# EAGLE board SparkFun_Main_Board_Single_v21-Panel (EAGLE 9.6.2), part 1 of 3
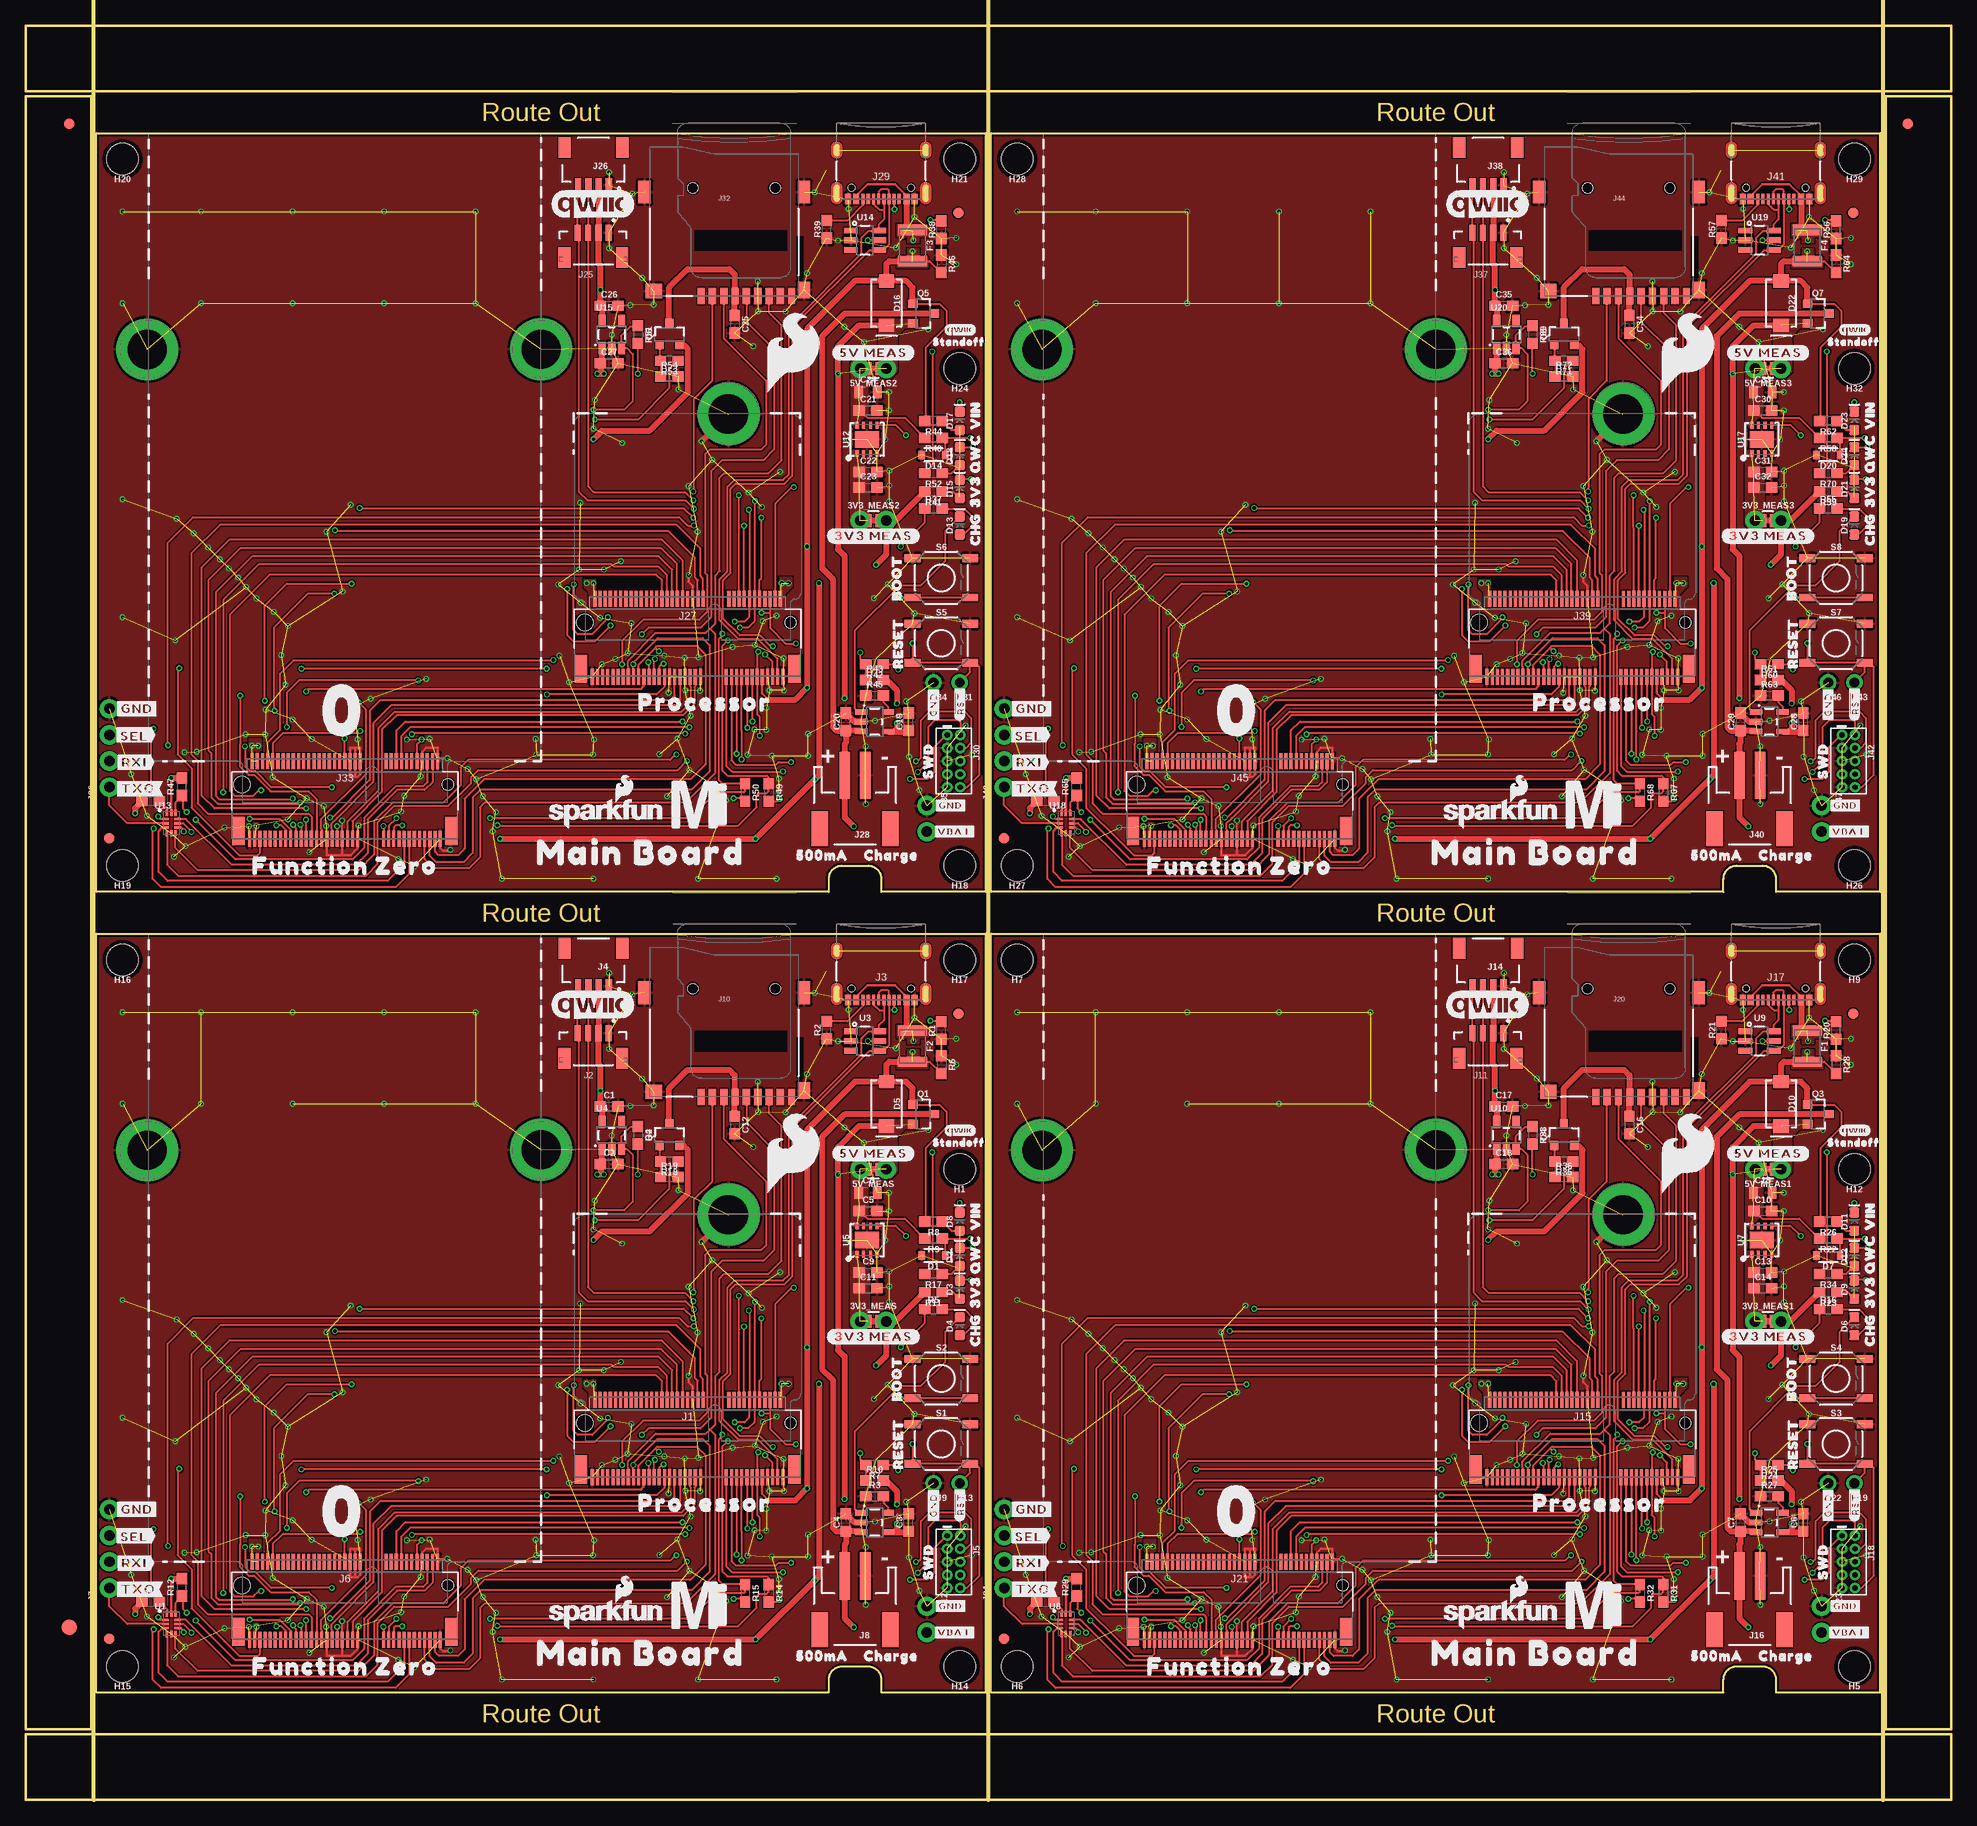
[diagram p0: board, top side]
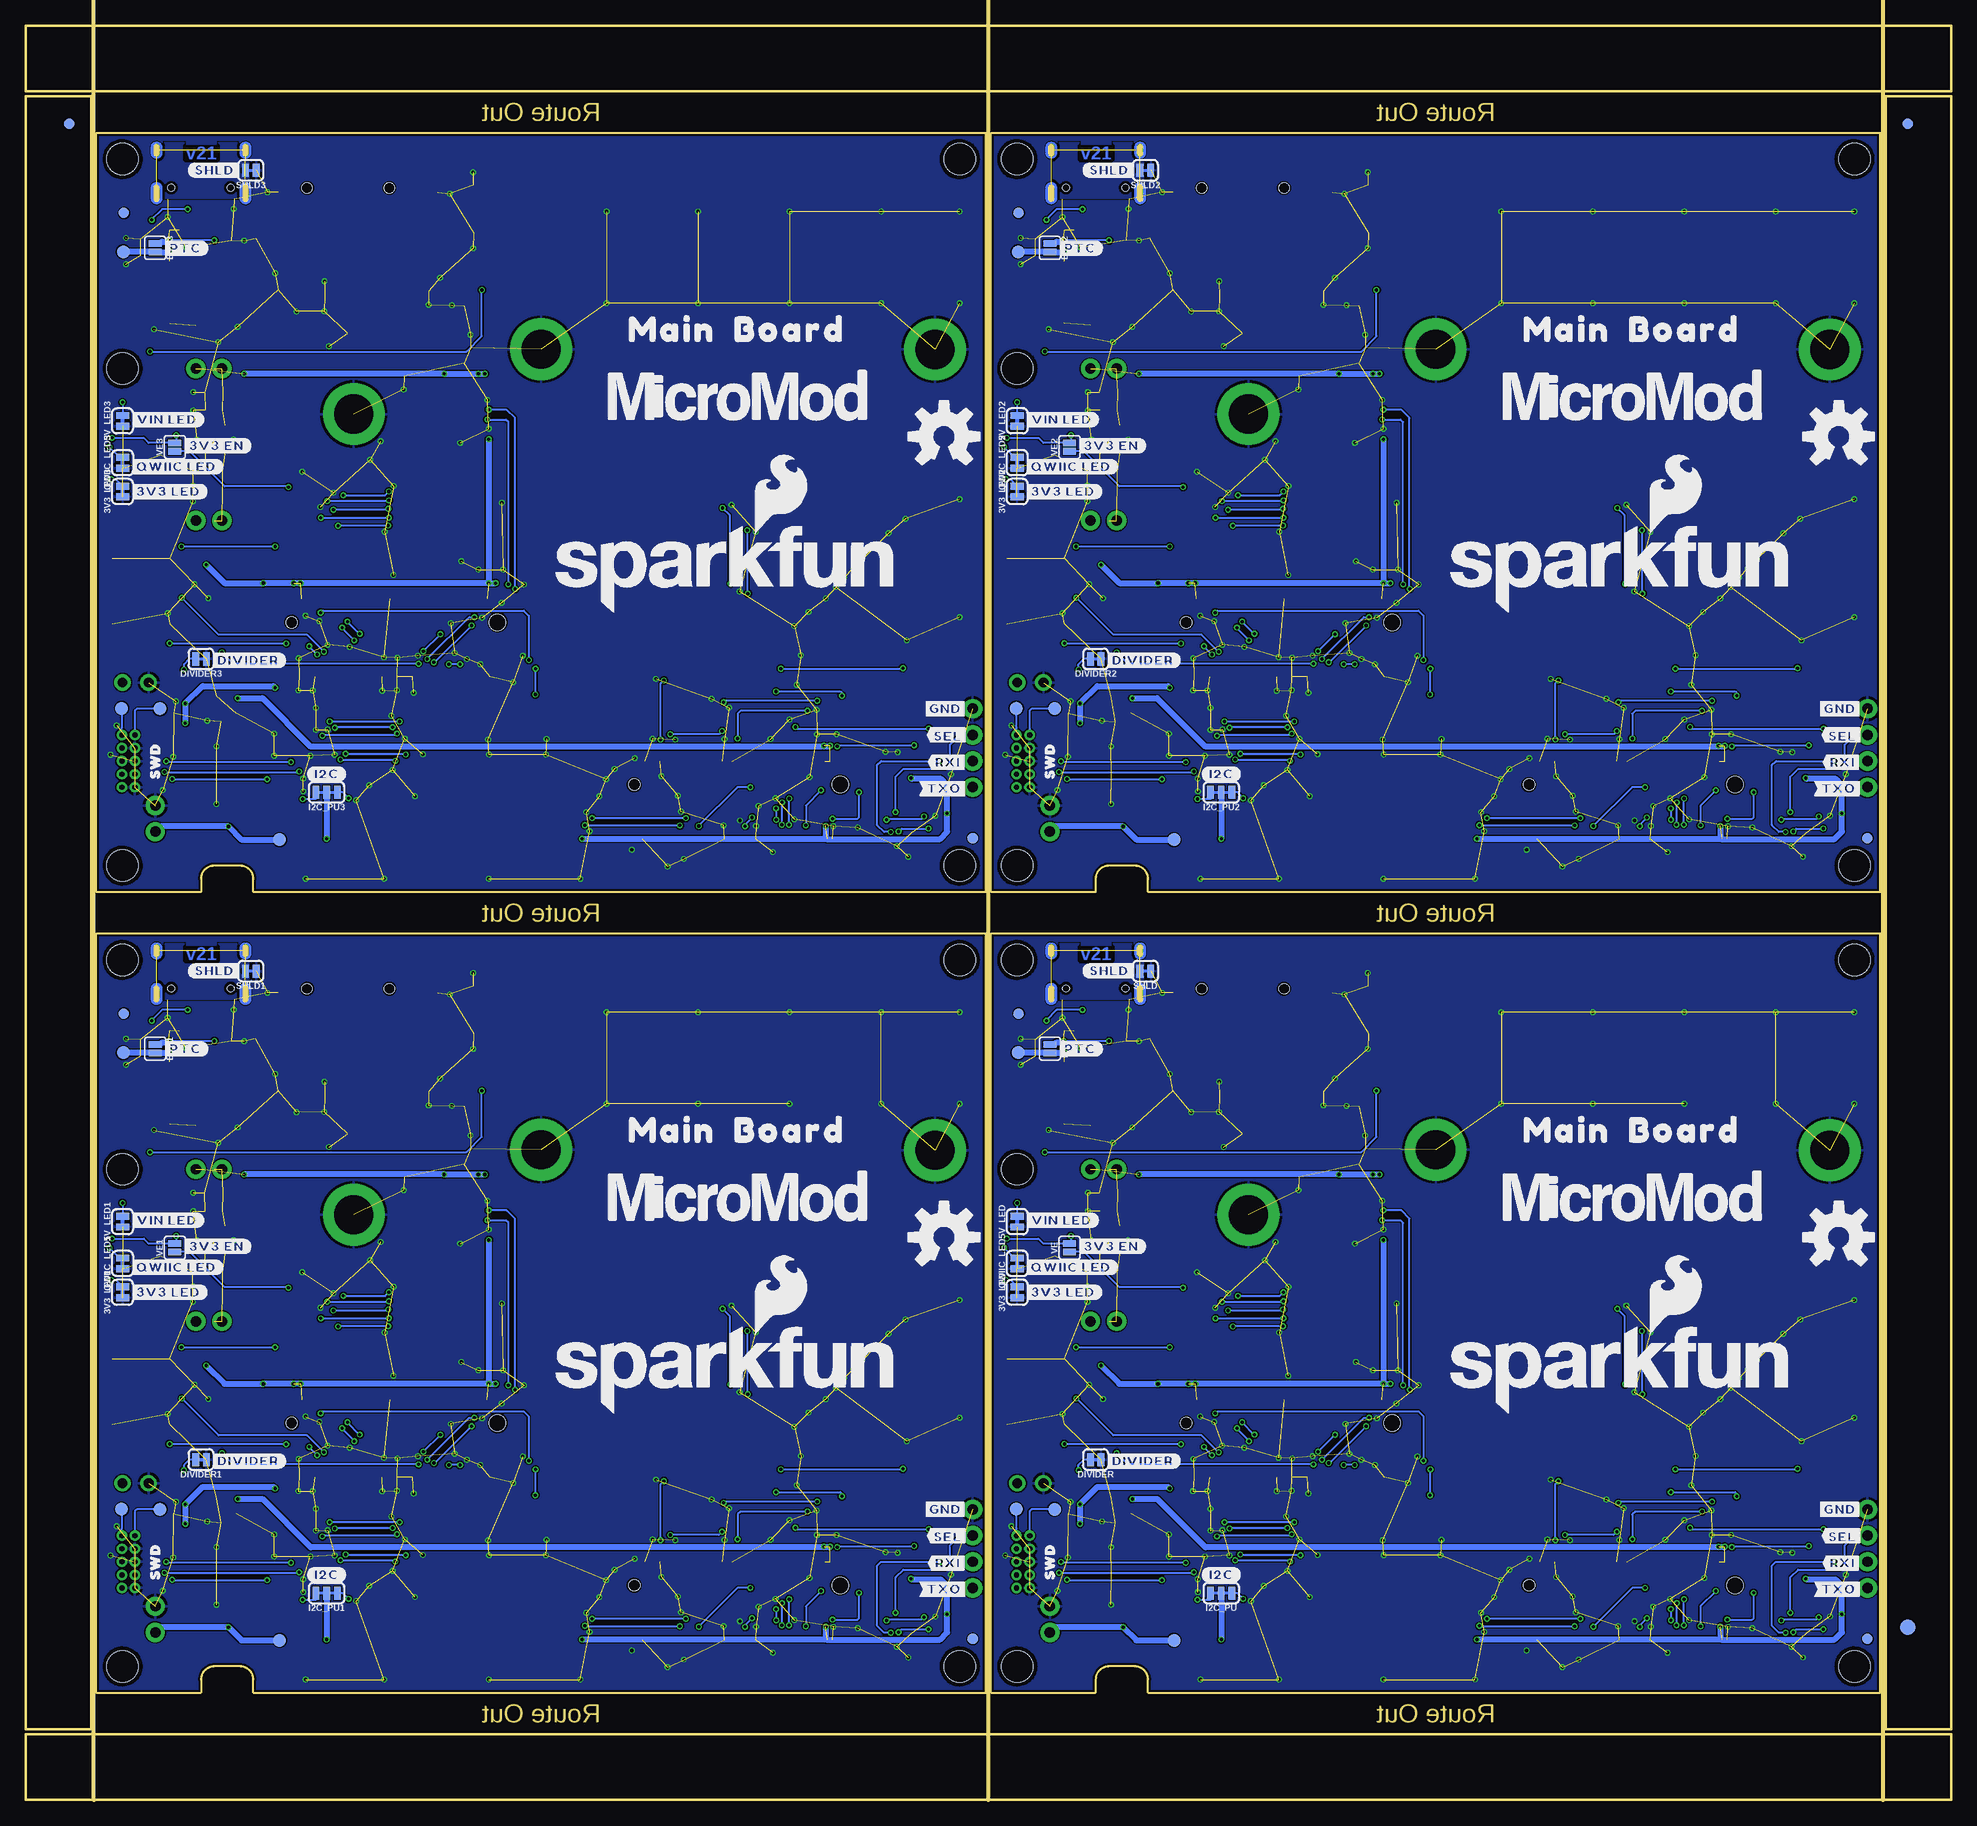
[diagram p1: board, bottom side, seen from below]

Size 186.94 x 172.21 mm. Coordinates in mm from the lower left corner, seen from the top.
Outline: 6.86,84.07 93.22,84.07 93.22,10.41 83.06,10.41 83.06,11.68 arc90 81.79,12.95 79.25,12.95 arc90 77.98,11.68 77.98,10.41 6.86,10.41 6.86,84.07
Outline: 93.73,84.07 180.09,84.07 180.09,10.41 169.93,10.41 169.93,11.68 arc90 168.66,12.95 166.12,12.95 arc90 164.85,11.68 164.85,10.41 93.73,10.41 93.73,84.07
Outline: 6.86,161.8 93.22,161.8 93.22,88.14 83.06,88.14 83.06,89.41 arc90 81.79,90.68 79.25,90.68 arc90 77.98,89.41 77.98,88.14 6.86,88.14 6.86,161.8
Outline: 93.73,161.8 180.09,161.8 180.09,88.14 169.93,88.14 169.93,89.41 arc90 168.66,90.68 166.12,90.68 arc90 164.85,89.41 164.85,88.14 93.73,88.14 93.73,161.8
Outline: 0,6.35 186.94,6.35 186.94,0 0,0 0,6.35
Outline: 180.59,165.35 186.94,165.35 186.94,6.86 180.59,6.86 180.59,165.35
Outline: 0,172.21 186.94,172.21 186.94,165.86 0,165.86 0,172.21
Outline: 0,165.35 6.35,165.35 6.35,6.86 0,6.86 0,165.35
Copper layers (1*16): Top 0.035mm / dielectric 1.5mm / Bottom 0.035mm
Design rules "SparkFun_Main_Board_Single_v21": minimum track width 5mil, minimum drill 0.3mm, track to track 5mil, track to pad 5mil, pad to pad 5mil, via to via 5mil, smd to smd 5mil, copper to edge 7mil, drill to drill 7mil, minimum pad ring 5mil, minimum via ring 5mil, stop-mask expansion 2.5mil, vias tented up to drill 25mil, thermal gap 10mil
Net classes: 0 default: width 0.178 mm, drill 0.305 mm; 1 POWER: width 0.559 mm, drill 0.305 mm; 2 Diff pairs: width 0.203 mm, drill 0.305 mm
tRestrict: area 31.7,22.9 to 31.8,23.3; area 32.2,22.9 to 32.3,23.3; area 118.5,22.9 to 118.7,23.3; area 119,22.9 to 119.2,23.3; area 31.7,100.6 to 31.8,101; area 32.2,100.6 to 32.3,101; area 118.5,100.6 to 118.7,101; area 119,100.6 to 119.2,101
Milling: 3 lines

## Footprints (pad centres in the part's own frame; a part is rotated, then mirrored left to right if it is on the bottom)
SMT-JUMPER_2_NC_TRACE_SILK = smd 0.66 x 1.27: 1 -0.521,0; 2 0.521,0
COMBO-JUMPER_2_NC_TRACE = smd 0.635 x 1.27: 1 -0.508,0; 2 0.508,0 | drill 1.016 pad 1.88: 3 -1.27,0; 4 1.27,0
SMT-JUMPER_2_NO_SILK = smd 0.635 x 1.27: 1 -0.406,0; 2 0.406,0
0603 = smd 1.1 x 1: 1 -0.85,0; 2 0.85,0
0805 = smd 0.8 x 1.2: 1 -0.9,0; 2 0.9,0
SOD-323 = smd 0.63 x 0.83: A 1.15,0; C -1.15,0
LED-0603 = smd 1 x 1: A -0.877,0; C 0.877,0
SMA-DIODE = smd 1.27 x 1.47: A -2.15,0; C 2.15,0
FIDUCIAL-1X2 = smd 1 x 1: 1 0,0
FIDUCIAL-1.5X3 = smd 1.5 x 1.5: 1 0,0
1210 = smd 1 x 2.8: 1 -1.5,0; 2 1.5,0
STAND-OFF-TIGHT = hole 3.048: 0,0
STAND-OFF-REFLOW-M2.5 = drill 3.8 pad 6: 1 0,0
SMT-JUMPER_3_2-NC_TRACE_SILK = smd 0.66 x 1.27: 1 -1.041,0; 2 0,0; 3 1.041,0
M.2-CONNECTOR-E = smd 0.3 x 1.55: 1 9.25,-5.275; 2 9,2.275; 3 8.75,-5.275; 4 8.5,2.275; 5 8.25,-5.275; 6 8,2.275; 7 7.75,-5.275; 8 7.5,2.275; 9 7.25,-5.275; 10 7,2.275; 11 6.75,-5.275; 12 6.5,2.275; 13 6.25,-5.275; 14 6,2.275; 15 5.75,-5.275; 16 5.5,2.275; 17 5.25,-5.275; 18 5,2.275; 19 4.75,-5.275; 20 4.5,2.275; 21 4.25,-5.275; 22 4,2.275; 23 3.75,-5.275; 32 1.5,2.275; 33 1.25,-5.275; 34 1,2.275; 35 0.75,-5.275; 36 0.5,2.275; 37 0.25,-5.275; 38 0,2.275; 39 -0.25,-5.275; 40 -0.5,2.275; 41 -0.75,-5.275; 42 -1,2.275; 43 -1.25,-5.275; 44 -1.5,2.275; 45 -1.75,-5.275; 46 -2,2.275; 47 -2.25,-5.275; 48 -2.5,2.275; 49 -2.75,-5.275; 50 -3,2.275; 51 -3.25,-5.275; 52 -3.5,2.275; 53 -3.75,-5.275; 54 -4,2.275; 55 -4.25,-5.275; 56 -4.5,2.275; 57 -4.75,-5.275; 58 -5,2.275; 59 -5.25,-5.275; 60 -5.5,2.275; 61 -5.75,-5.275; 62 -6,2.275; 63 -6.25,-5.275; 64 -6.5,2.275; 65 -6.75,-5.275; 66 -7,2.275; 67 -7.25,-5.275; 68 -7.5,2.275; 69 -7.75,-5.275; 70 -8,2.275; 71 -8.25,-5.275; 72 -8.5,2.275; 73 -8.75,-5.275; 74 -9,2.275; 75 -9.25,-5.275 | smd 1.2 x 2.75: A1 10.35,-4.5; A2 -10.35,-4.5 | hole 1.1: 10,0 | hole 1.6: -10,0
JST04_1MM_VERT = smd 0.6 x 1.55: 1 -1.478,0.775; 2 -0.478,0.775; 3 0.522,0.775; 4 1.522,0.775 | smd 1.2 x 2: NC1 -2.778,3.2; NC2 2.822,3.2
USB-C-16P-2LAYER-PADS = smd 0.3 x 1: A5 -1.25,-0.34; A6 -0.25,-0.34; A7 0.25,-0.34; A8 1.25,-0.34; B5 1.75,-0.34; B6 0.75,-0.34; B7 -0.75,-0.34; B8 -1.75,-0.34 | smd 0.6 x 1: GND -3.225,-0.34; GND2 3.225,-0.34; VBUS1 -2.45,-0.34; VBUS2 2.45,-0.34 | drill 0.4 pad 0.6 long: SHLD1 -4.318,-0.915; SHLD2 4.318,-0.915; SHLD3 -4.318,-5.095; SHLD4 4.318,-5.095 | hole 0.65: -2.89,-1.445; 2.89,-1.445
JST04_1MM_RA = smd 0.6 x 1.35: 1 -1.5,0; 2 -0.5,0; 3 0.5,0; 4 1.5,0 | smd 1.2 x 2: NC1 2.8,-3.675; NC2 -2.8,-3.675
2X5-PTH-1.27MM = drill 0.508 pad 1: 1 -2.54,-0.635; 2 -2.54,0.635; 3 -1.27,-0.635; 4 -1.27,0.635; 5 0,-0.635; 6 0,0.635; 7 1.27,-0.635; 8 1.27,0.635; 9 2.54,-0.635; 10 2.54,0.635
M.2-CONNECTOR-E-FUNCTION-STANDARD = smd 0.3 x 1.55: 1 9.25,-5.275; 2 9,2.275; 3 8.75,-5.275; 4 8.5,2.275; 5 8.25,-5.275; 6 8,2.275; 7 7.75,-5.275; 8 7.5,2.275; 9 7.25,-5.275; 10 7,2.275; 11 6.75,-5.275; 12 6.5,2.275; 13 6.25,-5.275; 14 6,2.275; 15 5.75,-5.275; 16 5.5,2.275; 17 5.25,-5.275; 18 5,2.275; 19 4.75,-5.275; 20 4.5,2.275; 21 4.25,-5.275; 22 4,2.275; 23 3.75,-5.275; 32 1.5,2.275; 33 1.25,-5.275; 34 1,2.275; 35 0.75,-5.275; 36 0.5,2.275; 37 0.25,-5.275; 38 0,2.275; 39 -0.25,-5.275; 40 -0.5,2.275; 41 -0.75,-5.275; 42 -1,2.275; 43 -1.25,-5.275; 44 -1.5,2.275; 45 -1.75,-5.275; 46 -2,2.275; 47 -2.25,-5.275; 48 -2.5,2.275; 49 -2.75,-5.275; 50 -3,2.275; 51 -3.25,-5.275; 52 -3.5,2.275; 53 -3.75,-5.275; 54 -4,2.275; 55 -4.25,-5.275; 56 -4.5,2.275; 57 -4.75,-5.275; 58 -5,2.275; 59 -5.25,-5.275; 60 -5.5,2.275; 61 -5.75,-5.275; 62 -6,2.275; 63 -6.25,-5.275; 64 -6.5,2.275; 65 -6.75,-5.275; 66 -7,2.275; 67 -7.25,-5.275; 68 -7.5,2.275; 69 -7.75,-5.275; 70 -8,2.275; 71 -8.25,-5.275; 72 -8.5,2.275; 73 -8.75,-5.275; 74 -9,2.275; 75 -9.25,-5.275 | smd 1.2 x 2.75: A1 10.35,-4.5; A2 -10.35,-4.5 | hole 1.1: 10,0 | hole 1.6: -10,0
1X04_NO_SILK = drill 1.016 pad 1.88: 1 0,0; 2 2.54,0; 3 5.08,0; 4 7.62,0
JST-2-SMD = smd 1 x 4.6: 1 -1,-3.7; 2 1,-3.7 | smd 1.6 x 3.4: NC1 -3.4,1.5; NC2 3.4,1.5
1X01_NO_SILK = drill 0.95 pad 1.6: 1 0,0
MICROSD-EXTERNALPIN = smd 0.7 x 1.6: 1 2.25,10.5; 2 1.15,10.5; 3 0.05,10.5; 4 -1.05,10.5; 5 -2.15,10.5; 6 -3.25,10.5; 7 -4.35,10.5; 8 -5.45,10.5; 9 -6.55,10.5 | smd 1.2 x 1.6: 10 -7.75,9.9 | smd 1.2 x 2.2: 11 -7.75,0.4; 12 7.75,0.4 | smd 1.6 x 1.4: 13 6.85,10 | hole 1: 3.05,0; -4.95,0
1X02_NO_SILK = drill 1.016 pad 1.88: 1 0,0; 2 2.54,0
SOT23-3 = smd 0.8 x 0.9: 1 -0.95,-1; 2 0.95,-1; 3 0,1.1
TACTILE_SWITCH_SMD_5.2MM = smd 1.524 x 0.762: 1 -2.794,1.905; 2 2.794,1.905; 3 -2.794,-1.905; 4 2.794,-1.905
PAD.03X.05 = smd 1.27 x 1.27: 1 0,0
STG3856 = smd 0.6 x 0.25: P1 -0.59,0.41; P2 -0.59,0.01; P3 -0.59,-0.39; P7 0.58,-0.39; P8 0.58,0.01; P9 0.58,0.41 | smd 0.25 x 0.6: P4 -0.42,-0.96; P5 -0.02,-0.96; P6 0.38,-0.96; P10 0.38,1.01; P11 -0.02,1.01; P12 -0.42,1.01
SOT23-5 = smd 0.55 x 1.2: 1 -0.95,-1.3; 2 0,-1.3; 3 0.95,-1.3; 4 0.95,1.3; 5 -0.95,1.3
SOT-23-6 = smd 0.55 x 1.35: 1 -0.95,-1.375; 2 0,-1.375; 3 0.95,-1.375; 4 0.95,1.375; 5 0,1.375; 6 -0.95,1.375
SOT25 = smd 0.7 x 1.2: 1 -0.95,-1.3; 2 0,-1.3; 3 0.95,-1.3; 4 0.95,1.3; 5 -0.95,1.3
UDFN-8 = smd 0.3 x 0.65: 1 -0.975,-1.375; 2 -0.325,-1.375; 3 0.325,-1.375; 4 0.975,-1.375; 5 0.975,1.375; 6 0.325,1.375; 7 -0.325,1.375; 8 -0.975,1.375 | smd 2.35 x 1.6: EP 0,0

## Placement (x,y rotation side)
3V3_LED  JUMPER-SMT_2_NC_TRACE_SILK  [SMT-JUMPER_2_NC_TRACE_SILK]  90.68,49.28 90 bottom
3V3_LED1  JUMPER-SMT_2_NC_TRACE_SILK  [SMT-JUMPER_2_NC_TRACE_SILK]  177.55,49.28 90 bottom
3V3_LED2  JUMPER-SMT_2_NC_TRACE_SILK  [SMT-JUMPER_2_NC_TRACE_SILK]  90.68,127 90 bottom
3V3_LED3  JUMPER-SMT_2_NC_TRACE_SILK  [SMT-JUMPER_2_NC_TRACE_SILK]  177.55,127 90 bottom
3V3_MEAS  JUMPER-COMBO_2_NC_TRACE  [COMBO-JUMPER_2_NC_TRACE]  82.3,46.46 0 top
3V3_MEAS1  JUMPER-COMBO_2_NC_TRACE  [COMBO-JUMPER_2_NC_TRACE]  169.16,46.46 0 top
3V3_MEAS2  JUMPER-COMBO_2_NC_TRACE  [COMBO-JUMPER_2_NC_TRACE]  82.3,124.18 0 top
3V3_MEAS3  JUMPER-COMBO_2_NC_TRACE  [COMBO-JUMPER_2_NC_TRACE]  169.16,124.18 0 top
5V_LED  JUMPER-SMT_2_NC_TRACE_SILK  [SMT-JUMPER_2_NC_TRACE_SILK]  90.68,56.13 90 bottom
5V_LED1  JUMPER-SMT_2_NC_TRACE_SILK  [SMT-JUMPER_2_NC_TRACE_SILK]  177.55,56.13 90 bottom
5V_LED2  JUMPER-SMT_2_NC_TRACE_SILK  [SMT-JUMPER_2_NC_TRACE_SILK]  90.68,133.86 90 bottom
5V_LED3  JUMPER-SMT_2_NC_TRACE_SILK  [SMT-JUMPER_2_NC_TRACE_SILK]  177.55,133.86 90 bottom
5V_MEAS  JUMPER-COMBO_2_NC_TRACE  [COMBO-JUMPER_2_NC_TRACE]  82.3,61.21 180 top
5V_MEAS1  JUMPER-COMBO_2_NC_TRACE  [COMBO-JUMPER_2_NC_TRACE]  169.16,61.21 180 top
5V_MEAS2  JUMPER-COMBO_2_NC_TRACE  [COMBO-JUMPER_2_NC_TRACE]  82.3,138.94 180 top
5V_MEAS3  JUMPER-COMBO_2_NC_TRACE  [COMBO-JUMPER_2_NC_TRACE]  169.16,138.94 180 top
BYP  JUMPER-SMT_2_NO_SILK  [SMT-JUMPER_2_NO_SILK]  87.5,72.92 270 bottom
BYP1  JUMPER-SMT_2_NO_SILK  [SMT-JUMPER_2_NO_SILK]  174.37,72.92 270 bottom
BYP2  JUMPER-SMT_2_NO_SILK  [SMT-JUMPER_2_NO_SILK]  87.5,150.65 270 bottom
BYP3  JUMPER-SMT_2_NO_SILK  [SMT-JUMPER_2_NO_SILK]  174.37,150.65 270 bottom
C1  1.0uF  [0603]  56.64,67.31 0 top
C2  1.0uF  [0603]  56.64,61.72 0 top
C3  4.7uF  [0603]  85.73,26.92 90 top
C4  4.7uF  [0603]  79.63,26.92 90 top
C5  0.1uF  [0603]  81.79,57.15 0 top
C6  4.7uF  [0603]  172.59,26.92 90 top
C7  4.7uF  [0603]  166.5,26.92 90 top
C8  10uF  [0805]  81.79,58.93 0 top
C9  10uF  [0603]  81.79,51.18 0 top
C10  0.1uF  [0603]  168.66,57.15 0 top
C11  4.7uF  [0603]  81.79,49.66 0 top
C12  10uF  [0603]  68.83,65.51 270 top
C13  10uF  [0603]  168.66,51.18 0 top
C14  4.7uF  [0603]  168.66,49.66 0 top
C15  10uF  [0805]  168.66,58.93 0 top
C16  10uF  [0603]  155.7,65.51 270 top
C17  1.0uF  [0603]  143.51,67.31 0 top
C18  1.0uF  [0603]  143.51,61.72 0 top
C19  4.7uF  [0603]  85.73,104.65 90 top
C20  4.7uF  [0603]  79.63,104.65 90 top
C21  0.1uF  [0603]  81.79,134.87 0 top
C22  10uF  [0603]  81.79,128.91 0 top
C23  4.7uF  [0603]  81.79,127.38 0 top
C24  10uF  [0805]  81.79,136.65 0 top
C25  10uF  [0603]  68.83,143.23 270 top
C26  1.0uF  [0603]  56.64,145.03 0 top
C27  1.0uF  [0603]  56.64,139.45 0 top
C28  4.7uF  [0603]  172.59,104.65 90 top
C29  4.7uF  [0603]  166.5,104.65 90 top
C30  0.1uF  [0603]  168.66,134.87 0 top
C31  10uF  [0603]  168.66,128.91 0 top
C32  4.7uF  [0603]  168.66,127.38 0 top
C33  10uF  [0805]  168.66,136.65 0 top
C34  10uF  [0603]  155.7,143.23 270 top
C35  1.0uF  [0603]  143.51,145.03 0 top
C36  1.0uF  [0603]  143.51,139.45 0 top
D1  3.3V  [SOD-323]  88.14,52.83 180 top
D2  RED  [LED-0603]  90.68,52.7 90 top
D3  RED  [LED-0603]  90.68,49.53 90 top
D4  Yellow  [LED-0603]  90.68,45.97 90 top
D5  3A/40V/500mV  [SMA-DIODE]  83.57,67.56 270 top
D6  Yellow  [LED-0603]  177.55,45.97 90 top
D7  3.3V  [SOD-323]  175.01,52.83 180 top
D8  RED  [LED-0603]  90.68,56.13 90 top
D9  RED  [LED-0603]  177.55,49.53 90 top
D10  3A/40V/500mV  [SMA-DIODE]  170.43,67.56 270 top
D11  RED  [LED-0603]  177.55,56.13 90 top
D12  RED  [LED-0603]  177.55,52.7 90 top
D13  Yellow  [LED-0603]  90.68,123.7 90 top
D14  3.3V  [SOD-323]  88.14,130.56 180 top
D15  RED  [LED-0603]  90.68,127.25 90 top
D16  3A/40V/500mV  [SMA-DIODE]  83.57,145.29 270 top
D17  RED  [LED-0603]  90.68,133.86 90 top
D18  RED  [LED-0603]  90.68,130.43 90 top
D19  Yellow  [LED-0603]  177.55,123.7 90 top
D20  3.3V  [SOD-323]  175.01,130.56 180 top
D21  RED  [LED-0603]  177.55,127.25 90 top
D22  3A/40V/500mV  [SMA-DIODE]  170.43,145.29 270 top
D23  RED  [LED-0603]  177.55,133.86 90 top
D24  RED  [LED-0603]  177.55,130.43 90 top
DIVIDER  JUMPER-SMT_2_NC_TRACE_SILK  [SMT-JUMPER_2_NC_TRACE_SILK]  83.06,33.02 180 bottom
DIVIDER1  JUMPER-SMT_2_NC_TRACE_SILK  [SMT-JUMPER_2_NC_TRACE_SILK]  169.93,33.02 180 bottom
DIVIDER2  JUMPER-SMT_2_NC_TRACE_SILK  [SMT-JUMPER_2_NC_TRACE_SILK]  83.06,110.74 180 bottom
DIVIDER3  JUMPER-SMT_2_NC_TRACE_SILK  [SMT-JUMPER_2_NC_TRACE_SILK]  169.93,110.74 180 bottom
E$1  [FIDUCIAL-1X2]  4.23,162.69 0 top
E$2  [FIDUCIAL-1X2]  4.23,162.69 0 bottom
E$3  [FIDUCIAL-1X2]  182.71,162.69 0 top
E$4  [FIDUCIAL-1X2]  182.71,162.69 0 bottom
E$5  [FIDUCIAL-1.5X3]  4.23,16.76 0 top
E$6  [FIDUCIAL-1.5X3]  4.23,16.76 0 bottom
F1  6V/2A  [1210]  172.97,73.15 270 top
F2  6V/2A  [1210]  86.11,73.15 270 top
F3  6V/2A  [1210]  86.11,150.88 270 top
F4  6V/2A  [1210]  172.97,150.88 270 top
FD1  FIDUCIAL1X2  [FIDUCIAL-1X2]  8.13,15.62 180 bottom
FD2  FIDUCIAL1X2  [FIDUCIAL-1X2]  8.13,15.62 180 top
FD3  FIDUCIAL1X2  [FIDUCIAL-1X2]  90.55,76.33 270 top
FD4  FIDUCIAL1X2  [FIDUCIAL-1X2]  90.55,76.33 90 bottom
FD5  FIDUCIAL1X2  [FIDUCIAL-1X2]  95,15.62 180 bottom
FD6  FIDUCIAL1X2  [FIDUCIAL-1X2]  95,15.62 180 top
FD7  FIDUCIAL1X2  [FIDUCIAL-1X2]  177.42,76.33 270 top
FD8  FIDUCIAL1X2  [FIDUCIAL-1X2]  177.42,76.33 90 bottom
FD9  FIDUCIAL1X2  [FIDUCIAL-1X2]  8.13,93.34 180 bottom
FD10  FIDUCIAL1X2  [FIDUCIAL-1X2]  8.13,93.34 180 top
FD11  FIDUCIAL1X2  [FIDUCIAL-1X2]  90.55,154.05 270 top
FD12  FIDUCIAL1X2  [FIDUCIAL-1X2]  90.55,154.05 90 bottom
FD13  FIDUCIAL1X2  [FIDUCIAL-1X2]  95,93.34 180 bottom
FD14  FIDUCIAL1X2  [FIDUCIAL-1X2]  95,93.34 180 top
FD15  FIDUCIAL1X2  [FIDUCIAL-1X2]  177.42,154.05 270 top
FD16  FIDUCIAL1X2  [FIDUCIAL-1X2]  177.42,154.05 90 bottom
H1  STAND-OFFTIGHT  [STAND-OFF-TIGHT]  90.68,61.21 180 top
H2  STAND-OFF-REFLOW-M2.5_2.5MM_TALL  [STAND-OFF-REFLOW-M2.5]  11.79,63.07 180 top
H3  STAND-OFF-REFLOW-M2.5_2.5MM_TALL  [STAND-OFF-REFLOW-M2.5]  155.09,56.8 90 top
H4  STAND-OFF-REFLOW-M2.5_2.5MM_TALL  [STAND-OFF-REFLOW-M2.5]  50.05,63.09 90 top
H5  STAND-OFFTIGHT  [STAND-OFF-TIGHT]  177.55,12.95 180 top
H6  STAND-OFFTIGHT  [STAND-OFF-TIGHT]  96.27,12.95 180 top
H7  STAND-OFFTIGHT  [STAND-OFF-TIGHT]  96.27,81.53 180 top
H8  STAND-OFF-REFLOW-M2.5_2.5MM_TALL  [STAND-OFF-REFLOW-M2.5]  68.22,56.8 90 top
H9  STAND-OFFTIGHT  [STAND-OFF-TIGHT]  177.55,81.53 180 top
H10  STAND-OFF-REFLOW-M2.5_2.5MM_TALL  [STAND-OFF-REFLOW-M2.5]  98.66,63.07 180 top
H11  STAND-OFF-REFLOW-M2.5_2.5MM_TALL  [STAND-OFF-REFLOW-M2.5]  136.92,63.09 90 top
H12  STAND-OFFTIGHT  [STAND-OFF-TIGHT]  177.55,61.21 180 top
H13  STAND-OFF-REFLOW-M2.5_2.5MM_TALL  [STAND-OFF-REFLOW-M2.5]  68.22,134.52 90 top
H14  STAND-OFFTIGHT  [STAND-OFF-TIGHT]  90.68,12.95 180 top
H15  STAND-OFFTIGHT  [STAND-OFF-TIGHT]  9.4,12.95 180 top
H16  STAND-OFFTIGHT  [STAND-OFF-TIGHT]  9.4,81.53 180 top
H17  STAND-OFFTIGHT  [STAND-OFF-TIGHT]  90.68,81.53 180 top
H18  STAND-OFFTIGHT  [STAND-OFF-TIGHT]  90.68,90.68 180 top
H19  STAND-OFFTIGHT  [STAND-OFF-TIGHT]  9.4,90.68 180 top
H20  STAND-OFFTIGHT  [STAND-OFF-TIGHT]  9.4,159.26 180 top
H21  STAND-OFFTIGHT  [STAND-OFF-TIGHT]  90.68,159.26 180 top
H22  STAND-OFF-REFLOW-M2.5_2.5MM_TALL  [STAND-OFF-REFLOW-M2.5]  11.79,140.79 180 top
H23  STAND-OFF-REFLOW-M2.5_2.5MM_TALL  [STAND-OFF-REFLOW-M2.5]  50.05,140.82 90 top
H24  STAND-OFFTIGHT  [STAND-OFF-TIGHT]  90.68,138.94 180 top
H25  STAND-OFF-REFLOW-M2.5_2.5MM_TALL  [STAND-OFF-REFLOW-M2.5]  155.09,134.52 90 top
H26  STAND-OFFTIGHT  [STAND-OFF-TIGHT]  177.55,90.68 180 top
H27  STAND-OFFTIGHT  [STAND-OFF-TIGHT]  96.27,90.68 180 top
H28  STAND-OFFTIGHT  [STAND-OFF-TIGHT]  96.27,159.26 180 top
H29  STAND-OFFTIGHT  [STAND-OFF-TIGHT]  177.55,159.26 180 top
H30  STAND-OFF-REFLOW-M2.5_2.5MM_TALL  [STAND-OFF-REFLOW-M2.5]  98.66,140.79 180 top
H31  STAND-OFF-REFLOW-M2.5_2.5MM_TALL  [STAND-OFF-REFLOW-M2.5]  136.92,140.82 90 top
H32  STAND-OFFTIGHT  [STAND-OFF-TIGHT]  177.55,138.94 180 top
I2C_PU  JUMPER-SMT_3_2-NC_TRACE_SILK  [SMT-JUMPER_3_2-NC_TRACE_SILK]  70.87,20.07 180 bottom
I2C_PU1  JUMPER-SMT_3_2-NC_TRACE_SILK  [SMT-JUMPER_3_2-NC_TRACE_SILK]  157.73,20.07 180 bottom
I2C_PU2  JUMPER-SMT_3_2-NC_TRACE_SILK  [SMT-JUMPER_3_2-NC_TRACE_SILK]  70.87,97.79 180 bottom
I2C_PU3  JUMPER-SMT_3_2-NC_TRACE_SILK  [SMT-JUMPER_3_2-NC_TRACE_SILK]  157.73,97.79 180 bottom
J1  MICROMOD-2222-C  [M.2-CONNECTOR-E]  64.26,36.58 0 top
J2  Vertical Qwiic Connector  [JST04_1MM_VERT]  55.12,75.18 180 top
J3  [USB-C-16P-2LAYER-PADS]  83.06,77.32 180 top
J4  QWIIC_RIGHT_ANGLE  [JST04_1MM_RA]  55.12,78.99 180 top
J5  CORTEX_JTAG_DEBUG_MINIMUM_PTH  [2X5-PTH-1.27MM]  90.11,23.11 270 top
J6  MICROMOD_FUNCTION_MAIN  [M.2-CONNECTOR-E-FUNCTION-STANDARD]  30.99,20.83 0 top
J7  [1X04_NO_SILK]  8.13,20.57 90 top
J8  [JST-2-SMD]  80.52,18.03 180 top
J9  [1X01_NO_SILK]  88.14,30.73 180 top
J10  MICRO-SD-PUSH-PUSH-EXT-PIN  [MICROSD-EXTERNALPIN]  67.82,78.74 180 top
J11  Vertical Qwiic Connector  [JST04_1MM_VERT]  141.99,75.18 180 top
J12  [1X02_NO_SILK]  87.5,18.8 270 top
J13  [1X01_NO_SILK]  90.68,30.73 180 top
J14  QWIIC_RIGHT_ANGLE  [JST04_1MM_RA]  141.99,78.99 180 top
J15  MICROMOD-2222-C  [M.2-CONNECTOR-E]  151.13,36.58 0 top
J16  [JST-2-SMD]  167.39,18.03 180 top
J17  [USB-C-16P-2LAYER-PADS]  169.93,77.32 180 top
J18  CORTEX_JTAG_DEBUG_MINIMUM_PTH  [2X5-PTH-1.27MM]  176.97,23.11 270 top
J19  [1X01_NO_SILK]  177.55,30.73 180 top
J20  MICRO-SD-PUSH-PUSH-EXT-PIN  [MICROSD-EXTERNALPIN]  154.69,78.74 180 top
J21  MICROMOD_FUNCTION_MAIN  [M.2-CONNECTOR-E-FUNCTION-STANDARD]  117.86,20.83 0 top
J22  [1X01_NO_SILK]  175.01,30.73 180 top
J23  [1X02_NO_SILK]  174.37,18.8 270 top
J24  [1X04_NO_SILK]  95,20.57 90 top
J25  Vertical Qwiic Connector  [JST04_1MM_VERT]  55.12,152.91 180 top
J26  QWIIC_RIGHT_ANGLE  [JST04_1MM_RA]  55.12,156.72 180 top
J27  MICROMOD-2222-C  [M.2-CONNECTOR-E]  64.26,114.3 0 top
J28  [JST-2-SMD]  80.52,95.76 180 top
J29  [USB-C-16P-2LAYER-PADS]  83.06,155.04 180 top
J30  CORTEX_JTAG_DEBUG_MINIMUM_PTH  [2X5-PTH-1.27MM]  90.11,100.83 270 top
J31  [1X01_NO_SILK]  90.68,108.46 180 top
J32  MICRO-SD-PUSH-PUSH-EXT-PIN  [MICROSD-EXTERNALPIN]  67.82,156.46 180 top
J33  MICROMOD_FUNCTION_MAIN  [M.2-CONNECTOR-E-FUNCTION-STANDARD]  30.99,98.55 0 top
J34  [1X01_NO_SILK]  88.14,108.46 180 top
J35  [1X02_NO_SILK]  87.5,96.52 270 top
J36  [1X04_NO_SILK]  8.13,98.3 90 top
J37  Vertical Qwiic Connector  [JST04_1MM_VERT]  141.99,152.91 180 top
J38  QWIIC_RIGHT_ANGLE  [JST04_1MM_RA]  141.99,156.72 180 top
J39  MICROMOD-2222-C  [M.2-CONNECTOR-E]  151.13,114.3 0 top
J40  [JST-2-SMD]  167.39,95.76 180 top
J41  [USB-C-16P-2LAYER-PADS]  169.93,155.04 180 top
J42  CORTEX_JTAG_DEBUG_MINIMUM_PTH  [2X5-PTH-1.27MM]  176.97,100.83 270 top
J43  [1X01_NO_SILK]  177.55,108.46 180 top
J44  MICRO-SD-PUSH-PUSH-EXT-PIN  [MICROSD-EXTERNALPIN]  154.69,156.46 180 top
J45  MICROMOD_FUNCTION_MAIN  [M.2-CONNECTOR-E-FUNCTION-STANDARD]  117.86,98.55 0 top
J46  [1X01_NO_SILK]  175.01,108.46 180 top
J47  [1X02_NO_SILK]  174.37,96.52 270 top
J48  [1X04_NO_SILK]  95,98.3 90 top
LOGO1  QWIIC_LOGO_8MM  [QWIIC_8MM]  55.07,77.17 0 top
LOGO2  SFE_LOGO_NAME_FLAME.3_INCH  [SFE_LOGO_NAME_FLAME_.3]  32.26,41.71 0 bottom
LOGO3  OSHW-LOGOL  [OSHW-LOGO-L]  10.92,54.61 0 bottom
LOGO4  QWIIC_LOGO_8MM  [QWIIC_8MM]  141.94,77.17 0 top
LOGO5  SFE_LOGO_NAME_FLAME.3_INCH  [SFE_LOGO_NAME_FLAME_.3]  119.13,41.71 0 bottom
LOGO6  OSHW-LOGOL  [OSHW-LOGO-L]  97.79,54.61 0 bottom
LOGO7  QWIIC_LOGO_8MM  [QWIIC_8MM]  55.07,154.89 0 top
LOGO8  SFE_LOGO_NAME_FLAME.3_INCH  [SFE_LOGO_NAME_FLAME_.3]  32.26,119.43 0 bottom
LOGO9  OSHW-LOGOL  [OSHW-LOGO-L]  10.92,132.33 0 bottom
LOGO10  QWIIC_LOGO_8MM  [QWIIC_8MM]  141.94,154.89 0 top
LOGO11  SFE_LOGO_NAME_FLAME.3_INCH  [SFE_LOGO_NAME_FLAME_.3]  119.13,119.43 0 bottom
LOGO12  OSHW-LOGOL  [OSHW-LOGO-L]  97.79,132.33 0 bottom
Q1  3.1A/30V/105mΩ  [SOT23-3]  87.12,66.55 270 top
Q2  20V/4.2A/52mΩ/1.4W  [SOT23-3]  62.48,64.52 0 top
Q3  3.1A/30V/105mΩ  [SOT23-3]  173.99,66.55 270 top
Q4  20V/4.2A/52mΩ/1.4W  [SOT23-3]  149.35,64.52 0 top
Q5  3.1A/30V/105mΩ  [SOT23-3]  87.12,144.27 270 top
Q6  20V/4.2A/52mΩ/1.4W  [SOT23-3]  62.48,142.24 0 top
Q7  3.1A/30V/105mΩ  [SOT23-3]  173.99,144.27 270 top
Q8  20V/4.2A/52mΩ/1.4W  [SOT23-3]  149.35,142.24 0 top
QWIIC_LED  JUMPER-SMT_2_NC_TRACE_SILK  [SMT-JUMPER_2_NC_TRACE_SILK]  90.68,52.07 90 bottom
QWIIC_LED1  JUMPER-SMT_2_NC_TRACE_SILK  [SMT-JUMPER_2_NC_TRACE_SILK]  177.55,52.07 90 bottom
QWIIC_LED2  JUMPER-SMT_2_NC_TRACE_SILK  [SMT-JUMPER_2_NC_TRACE_SILK]  90.68,129.79 90 bottom
QWIIC_LED3  JUMPER-SMT_2_NC_TRACE_SILK  [SMT-JUMPER_2_NC_TRACE_SILK]  177.55,129.79 90 bottom
R1  5.1k  [0603]  88.9,74.68 90 top
R2  5.1k  [0603]  77.77,74.73 90 top
R3  2.0k  [0603]  82.42,29.46 0 top
R4  100k  [0603]  59.44,64.52 270 top
R5  4.7k  [0603]  88.14,47.62 0 top
R6  10k  [0603]  88.9,71.37 270 top
R7  10k  [0603]  82.42,32.51 180 top
R8  2.2k  [0603]  88.14,56.13 180 top
R9  100k  [0603]  88.14,54.48 180 top
R10  20k  [0603]  82.42,30.99 0 top
R11  1k  [0603]  88.14,49.28 180 top
R12  100k  [0603]  15.16,20.62 90 top
R13  100k  [0603]  12.14,19.23 0 top
R14  2.2k  [0603]  72.14,20.07 270 top
R15  2.2k  [0603]  69.85,20.07 270 top
R16  4.7k  [0603]  175.01,47.62 0 top
R17  1k  [0603]  88.14,51.05 180 top
R18  100  [0603]  62.48,61.98 180 top
R19  100k  [0603]  62.48,60.45 0 top
R20  5.1k  [0603]  175.77,74.68 90 top
R21  5.1k  [0603]  164.64,74.73 90 top
R22  100k  [0603]  175.01,54.48 180 top
R23  1k  [0603]  175.01,49.28 180 top
R24  10k  [0603]  169.29,32.51 180 top
R25  20k  [0603]  169.29,30.99 0 top
R26  2.2k  [0603]  175.01,56.13 180 top
R27  2.0k  [0603]  169.29,29.46 0 top
R28  10k  [0603]  175.77,71.37 270 top
R29  100k  [0603]  102.03,20.62 90 top
R30  100k  [0603]  99.01,19.23 0 top
R31  2.2k  [0603]  159,20.07 270 top
R32  2.2k  [0603]  156.72,20.07 270 top
R33  100k  [0603]  146.3,64.52 270 top
R34  1k  [0603]  175.01,51.05 180 top
R35  100  [0603]  149.35,61.98 180 top
R36  100k  [0603]  149.35,60.45 0 top
R37  4.7k  [0603]  88.14,125.35 0 top
R38  5.1k  [0603]  88.9,152.4 90 top
R39  5.1k  [0603]  77.77,152.45 90 top
R40  100k  [0603]  88.14,132.21 180 top
R41  1k  [0603]  88.14,127 180 top
R42  10k  [0603]  82.42,110.24 180 top
R43  20k  [0603]  82.42,108.71 0 top
R44  2.2k  [0603]  88.14,133.86 180 top
R45  2.0k  [0603]  82.42,107.19 0 top
R46  10k  [0603]  88.9,149.1 270 top
R47  100k  [0603]  15.16,98.35 90 top
R48  100k  [0603]  12.14,96.95 0 top
R49  2.2k  [0603]  72.14,97.79 270 top
R50  2.2k  [0603]  69.85,97.79 270 top
R51  100k  [0603]  59.44,142.24 270 top
R52  1k  [0603]  88.14,128.78 180 top
R53  100  [0603]  62.48,139.7 180 top
R54  100k  [0603]  62.48,138.18 0 top
R55  4.7k  [0603]  175.01,125.35 0 top
R56  5.1k  [0603]  175.77,152.4 90 top
R57  5.1k  [0603]  164.64,152.45 90 top
R58  100k  [0603]  175.01,132.21 180 top
R59  1k  [0603]  175.01,127 180 top
R60  10k  [0603]  169.29,110.24 180 top
R61  20k  [0603]  169.29,108.71 0 top
R62  2.2k  [0603]  175.01,133.86 180 top
R63  2.0k  [0603]  169.29,107.19 0 top
R64  10k  [0603]  175.77,149.1 270 top
R65  100k  [0603]  102.03,98.35 90 top
R66  100k  [0603]  99.01,96.95 0 top
R67  2.2k  [0603]  159,97.79 270 top
R68  2.2k  [0603]  156.72,97.79 270 top
R69  100k  [0603]  146.3,142.24 270 top
R70  1k  [0603]  175.01,128.78 180 top
R71  100  [0603]  149.35,139.7 180 top
R72  100k  [0603]  149.35,138.18 0 top
S1  Reset  [TACTILE_SWITCH_SMD_5.2MM]  88.9,34.54 0 top
S2  BOOT  [TACTILE_SWITCH_SMD_5.2MM]  88.9,40.89 0 top
S3  Reset  [TACTILE_SWITCH_SMD_5.2MM]  175.77,34.54 0 top
S4  BOOT  [TACTILE_SWITCH_SMD_5.2MM]  175.77,40.89 0 top
S5  Reset  [TACTILE_SWITCH_SMD_5.2MM]  88.9,112.27 0 top
S6  BOOT  [TACTILE_SWITCH_SMD_5.2MM]  88.9,118.62 0 top
S7  Reset  [TACTILE_SWITCH_SMD_5.2MM]  175.77,112.27 0 top
S8  BOOT  [TACTILE_SWITCH_SMD_5.2MM]  175.77,118.62 0 top
SHLD  JUMPER-SMT_2_NC_TRACE_SILK  [SMT-JUMPER_2_NC_TRACE_SILK]  78.23,80.44 180 bottom
SHLD1  JUMPER-SMT_2_NC_TRACE_SILK  [SMT-JUMPER_2_NC_TRACE_SILK]  165.1,80.44 180 bottom
SHLD2  JUMPER-SMT_2_NC_TRACE_SILK  [SMT-JUMPER_2_NC_TRACE_SILK]  78.23,158.17 180 bottom
SHLD3  JUMPER-SMT_2_NC_TRACE_SILK  [SMT-JUMPER_2_NC_TRACE_SILK]  165.1,158.17 180 bottom
TP1  TEST-POINT3X5  [PAD.03X.05]  90.77,28.22 180 bottom
TP2  TEST-POINT3X5  [PAD.03X.05]  87.05,28.21 0 bottom
TP3  TEST-POINT3X5  [PAD.03X.05]  75.44,15.49 90 bottom
TP4  TEST-POINT3X5  [PAD.03X.05]  90.6,72.54 180 bottom
TP5  TEST-POINT3X5  [PAD.03X.05]  173.91,28.21 0 bottom
TP6  TEST-POINT3X5  [PAD.03X.05]  162.31,15.49 90 bottom
TP7  TEST-POINT3X5  [PAD.03X.05]  177.47,72.54 180 bottom
TP8  TEST-POINT3X5  [PAD.03X.05]  177.64,28.22 180 bottom
TP9  TEST-POINT3X5  [PAD.03X.05]  87.05,105.93 0 bottom
TP10  TEST-POINT3X5  [PAD.03X.05]  75.44,93.22 90 bottom
TP11  TEST-POINT3X5  [PAD.03X.05]  90.6,150.27 180 bottom
TP12  TEST-POINT3X5  [PAD.03X.05]  90.77,105.94 180 bottom
TP13  TEST-POINT3X5  [PAD.03X.05]  173.91,105.93 0 bottom
TP14  TEST-POINT3X5  [PAD.03X.05]  162.31,93.22 90 bottom
TP15  TEST-POINT3X5  [PAD.03X.05]  177.47,150.27 180 bottom
TP16  TEST-POINT3X5  [PAD.03X.05]  177.64,105.94 180 bottom
U1  STG3856QTR  [STG3856]  14.15,17.07 0 top
U2  MCP73831  [SOT23-5]  82.42,26.92 270 top
U3  ESD Diode  [SOT-23-6]  81.48,73.66 270 top
U4  AP7347DQ-33W5-7K-3.3V  [SOT25]  56.9,64.52 0 top
U5  AP7361C-33  [UDFN-8]  81.69,54.33 0 top
U6  MCP73831  [SOT23-5]  169.29,26.92 270 top
U7  AP7361C-33  [UDFN-8]  168.55,54.33 0 top
U8  STG3856QTR  [STG3856]  101.02,17.07 0 top
U9  ESD Diode  [SOT-23-6]  168.35,73.66 270 top
U10  AP7347DQ-33W5-7K-3.3V  [SOT25]  143.76,64.52 0 top
U11  MCP73831  [SOT23-5]  82.42,104.65 270 top
U12  AP7361C-33  [UDFN-8]  81.69,132.05 0 top
U13  STG3856QTR  [STG3856]  14.15,94.79 0 top
U14  ESD Diode  [SOT-23-6]  81.48,151.38 270 top
U15  AP7347DQ-33W5-7K-3.3V  [SOT25]  56.9,142.24 0 top
U16  MCP73831  [SOT23-5]  169.29,104.65 270 top
U17  AP7361C-33  [UDFN-8]  168.55,132.05 0 top
U18  STG3856QTR  [STG3856]  101.02,94.79 0 top
U19  ESD Diode  [SOT-23-6]  168.35,151.38 270 top
U20  AP7347DQ-33W5-7K-3.3V  [SOT25]  143.76,142.24 0 top
U$1  [#TXO#7]  10.92,20.45 0 top
U$2  [#RXI#6]  10.54,22.99 0 top
U$3  [#PTC#15]  84.58,72.9 0 bottom
U$4  [3V332533]  92.2,49.28 90 top
U$5  [VIN32532]  92.2,56.64 90 top
U$6  [CHG32531]  92.2,45.59 90 top
U$7  [#SHLD#501]  81.74,80.47 0 bottom
U$8  [BOOT32541]  84.58,40.89 90 top
U$9  [RESET32540]  84.71,34.54 90 top
U$10  [PROCESSOR525]  65.91,28.83 0 top
U$11  [FUNCTION_ZERO520]  30.99,12.95 0 top
U$12  [##SEL##5]  10.54,25.65 0 top
U$13  [MAIN523]  37.34,65.02 0 bottom
U$14  [MICROMOD_MI_LOGO_1]  65.41,18.92 0 top
U$15  [0523]  30.99,27.94 0 top
U$16  [#GND#3]  10.79,28.19 0 top
U$17  [MICROMOD_LOGO_1]  30.99,58.67 0 bottom
U$18  [BOARD524]  25.91,65.02 0 bottom
U$19  [##SEL##3]  10.54,25.65 0 bottom
U$20  [#RXI#4]  10.54,22.99 0 bottom
U$21  [MAIN_BOARD5523]  59.69,14.25 0 top
U$22  [QWIIC_3MM]  90.73,64.97 0 top
U$23  [STANDOFF501]  90.6,63.8 0 top
U$24  [SFE_LOGO_FLAME_.3]  74.55,62.74 0 top
U$25  [SWD6522]  87.63,23.11 90 top
U$26  [#3V3_MEAS#6522]  82.3,44.96 0 top
U$27  [CHARGE501]  84.02,13.97 0 top
U$28  [#TXO#5]  10.92,20.45 0 bottom
U$29  [#GND#3]  10.79,28.19 0 bottom
U$30  [#I2C#501]  70.87,21.84 0 bottom
U$31  [#5V_MEAS#6522]  82.3,62.74 0 top
U$32  [SWD6522]  87.5,23.11 90 bottom
U$33  [500MA6520]  77.34,13.97 0 top
U$34  [SFE_LOGO_NAME_FLAME_.1]  56.39,18.03 0 top
U$35  [QWC4]  92.2,52.96 90 top
U$36  [#GND#10]  89.79,18.8 0 top
U$37  [#GND#10]  88.14,28.58 90 top
U$38  [##RST##8]  90.68,28.7 90 top
U$39  [#VBAT#9]  90.17,16.26 0 top
U$40  [3V332533]  179.07,49.28 90 top
U$41  [VIN32532]  179.07,56.64 90 top
U$42  [CHG32531]  179.07,45.59 90 top
U$43  [BOOT32541]  171.45,40.89 90 top
U$44  [RESET32540]  171.58,34.54 90 top
U$45  [PROCESSOR525]  152.78,28.83 0 top
U$46  [FUNCTION_ZERO520]  117.86,12.95 0 top
U$47  [MICROMOD_MI_LOGO_1]  152.27,18.92 0 top
U$48  [0523]  117.86,27.94 0 top
U$49  [#3V3_EN#23]  81.53,53.72 0 bottom
U$50  [#3V3_LED#22]  86.23,49.28 0 bottom
U$51  [#QWIIC_LED#22]  85.47,51.69 0 bottom
U$52  [#DIVIDER#23]  78.49,32.89 0 bottom
U$53  [#VIN_LED#24]  86.36,56.26 0 bottom
U$54  [MAIN523]  124.21,65.02 0 bottom
U$55  [BOARD524]  112.78,65.02 0 bottom
U$56  [MAIN_BOARD5523]  146.56,14.25 0 top
U$57  [MICROMOD_LOGO_1]  117.86,58.67 0 bottom
U$58  [QWIIC_3MM]  177.6,64.97 0 top
U$59  [STANDOFF501]  177.47,63.8 0 top
U$60  [SFE_LOGO_FLAME_.3]  161.42,62.74 0 top
U$61  [CHARGE501]  170.89,13.97 0 top
U$62  [#SHLD#501]  168.61,80.47 0 bottom
U$63  [#3V3_MEAS#6522]  169.16,44.96 0 top
U$64  [#5V_MEAS#6522]  169.16,62.74 0 top
U$65  [500MA6520]  164.21,13.97 0 top
U$66  [SWD6522]  174.5,23.11 90 top
U$67  [#3V3_EN#23]  168.4,53.72 0 bottom
U$68  [#3V3_LED#22]  173.1,49.28 0 bottom
U$69  [#QWIIC_LED#22]  172.34,51.69 0 bottom
U$70  [#DIVIDER#23]  165.35,32.89 0 bottom
U$71  [#VIN_LED#24]  173.23,56.26 0 bottom
U$72  [#I2C#501]  157.73,21.84 0 bottom
U$73  [#GND#3]  97.66,28.19 0 top
U$74  [#GND#3]  97.66,28.19 0 bottom
U$75  [SWD6522]  174.37,23.11 90 bottom
U$76  [SFE_LOGO_NAME_FLAME_.1]  143.26,18.03 0 top
U$77  [QWC4]  179.07,52.96 90 top
U$78  [#TXO#7]  97.79,20.45 0 top
U$79  [#RXI#6]  97.41,22.99 0 top
U$80  [##SEL##5]  97.41,25.65 0 top
U$81  [##SEL##3]  97.41,25.65 0 bottom
U$82  [#RXI#4]  97.41,22.99 0 bottom
U$83  [#TXO#5]  97.79,20.45 0 bottom
U$84  [#PTC#15]  171.45,72.9 0 bottom
U$85  [#GND#10]  176.66,18.8 0 top
U$86  [#GND#10]  175.01,28.58 90 top
U$87  [##RST##8]  177.55,28.7 90 top
U$88  [#VBAT#9]  177.04,16.26 0 top
U$89  [3V332533]  92.2,127 90 top
U$90  [VIN32532]  92.2,134.37 90 top
U$91  [CHG32531]  92.2,123.32 90 top
U$92  [BOOT32541]  84.58,118.62 90 top
U$93  [RESET32540]  84.71,112.27 90 top
U$94  [PROCESSOR525]  65.91,106.55 0 top
U$95  [FUNCTION_ZERO520]  30.99,90.68 0 top
U$96  [MICROMOD_MI_LOGO_1]  65.41,96.65 0 top
U$97  [0523]  30.99,105.66 0 top
U$98  [MAIN523]  37.34,142.75 0 bottom
U$99  [BOARD524]  25.91,142.75 0 bottom
U$100  [MAIN_BOARD5523]  59.69,91.97 0 top
U$101  [MICROMOD_LOGO_1]  30.99,136.4 0 bottom
U$102  [QWIIC_3MM]  90.73,142.7 0 top
U$103  [STANDOFF501]  90.6,141.53 0 top
U$104  [SFE_LOGO_FLAME_.3]  74.55,140.46 0 top
U$105  [CHARGE501]  84.02,91.69 0 top
U$106  [#SHLD#501]  81.74,158.19 0 bottom
U$107  [#3V3_MEAS#6522]  82.3,122.68 0 top
U$108  [#5V_MEAS#6522]  82.3,140.46 0 top
U$109  [500MA6520]  77.34,91.69 0 top
U$110  [SWD6522]  87.63,100.84 90 top
U$111  [#3V3_EN#23]  81.53,131.44 0 bottom
U$112  [#3V3_LED#22]  86.23,127 0 bottom
U$113  [#QWIIC_LED#22]  85.47,129.41 0 bottom
U$114  [#DIVIDER#23]  78.49,110.62 0 bottom
U$115  [#VIN_LED#24]  86.36,133.98 0 bottom
U$116  [#I2C#501]  70.87,99.57 0 bottom
U$117  [#GND#3]  10.79,105.92 0 top
U$118  [#GND#3]  10.79,105.92 0 bottom
U$119  [SWD6522]  87.5,100.84 90 bottom
U$120  [SFE_LOGO_NAME_FLAME_.1]  56.39,95.76 0 top
U$121  [QWC4]  92.2,130.68 90 top
U$122  [#TXO#7]  10.92,98.17 0 top
U$123  [#RXI#6]  10.54,100.71 0 top
U$124  [##SEL##5]  10.54,103.38 0 top
U$125  [##SEL##3]  10.54,103.38 0 bottom
U$126  [#RXI#4]  10.54,100.71 0 bottom
U$127  [#TXO#5]  10.92,98.17 0 bottom
U$128  [#PTC#15]  84.58,150.62 0 bottom
U$129  [#GND#10]  89.79,96.52 0 top
U$130  [#GND#10]  88.14,106.3 90 top
U$131  [##RST##8]  90.68,106.43 90 top
U$132  [#VBAT#9]  90.17,93.98 0 top
U$133  [3V332533]  179.07,127 90 top
U$134  [VIN32532]  179.07,134.37 90 top
U$135  [CHG32531]  179.07,123.32 90 top
U$136  [BOOT32541]  171.45,118.62 90 top
U$137  [RESET32540]  171.58,112.27 90 top
U$138  [PROCESSOR525]  152.78,106.55 0 top
U$139  [FUNCTION_ZERO520]  117.86,90.68 0 top
U$140  [MICROMOD_MI_LOGO_1]  152.27,96.65 0 top
U$141  [0523]  117.86,105.66 0 top
U$142  [MAIN523]  124.21,142.75 0 bottom
U$143  [BOARD524]  112.78,142.75 0 bottom
U$144  [MAIN_BOARD5523]  146.56,91.97 0 top
U$145  [MICROMOD_LOGO_1]  117.86,136.4 0 bottom
U$146  [QWIIC_3MM]  177.6,142.7 0 top
U$147  [STANDOFF501]  177.47,141.53 0 top
U$148  [SFE_LOGO_FLAME_.3]  161.42,140.46 0 top
U$149  [CHARGE501]  170.89,91.69 0 top
U$150  [#SHLD#501]  168.61,158.19 0 bottom
U$151  [#3V3_MEAS#6522]  169.16,122.68 0 top
U$152  [#5V_MEAS#6522]  169.16,140.46 0 top
U$153  [500MA6520]  164.21,91.69 0 top
U$154  [SWD6522]  174.5,100.84 90 top
U$155  [#3V3_EN#23]  168.4,131.44 0 bottom
U$156  [#3V3_LED#22]  173.1,127 0 bottom
U$157  [#QWIIC_LED#22]  172.34,129.41 0 bottom
U$158  [#DIVIDER#23]  165.35,110.62 0 bottom
U$159  [#VIN_LED#24]  173.23,133.98 0 bottom
U$160  [#I2C#501]  157.73,99.57 0 bottom
U$161  [#GND#3]  97.66,105.92 0 top
U$162  [#GND#3]  97.66,105.92 0 bottom
U$163  [SWD6522]  174.37,100.84 90 bottom
U$164  [SFE_LOGO_NAME_FLAME_.1]  143.26,95.76 0 top
U$165  [QWC4]  179.07,130.68 90 top
U$166  [#TXO#7]  97.79,98.17 0 top
U$167  [#RXI#6]  97.41,100.71 0 top
U$168  [##SEL##5]  97.41,103.38 0 top
U$169  [##SEL##3]  97.41,103.38 0 bottom
U$170  [#RXI#4]  97.41,100.71 0 bottom
U$171  [#TXO#5]  97.79,98.17 0 bottom
U$172  [#PTC#15]  171.45,150.62 0 bottom
U$173  [#GND#10]  176.66,96.52 0 top
U$174  [#GND#10]  175.01,106.3 90 top
U$175  [##RST##8]  177.55,106.43 90 top
U$176  [#VBAT#9]  177.04,93.98 0 top
VE  JUMPER-SMT_2_NO_SILK  [SMT-JUMPER_2_NO_SILK]  85.6,53.59 90 bottom
VE1  JUMPER-SMT_2_NO_SILK  [SMT-JUMPER_2_NO_SILK]  172.47,53.59 90 bottom
VE2  JUMPER-SMT_2_NO_SILK  [SMT-JUMPER_2_NO_SILK]  85.6,131.32 90 bottom
VE3  JUMPER-SMT_2_NO_SILK  [SMT-JUMPER_2_NO_SILK]  172.47,131.32 90 bottom

## Library data of the parts
3V3_LED 3V3_LED1-3V3_LED3 3V3_MEAS 3V3_MEAS1-3V3_MEAS3 5V_LED 5V_LED1-5V_LED3 5V_MEAS 5V_MEAS1-5V_MEAS3 BYP BYP1-BYP3 DIVIDER DIVIDER1-DIVIDER3 I2C_PU I2C_PU1-I2C_PU3 QWIIC_LED QWIIC_LED1-QWIIC_LED3 SHLD SHLD1-SHLD3 VE VE1-VE3 = SparkFun-Jumpers
C1 C2 C17 C18 C26 C27 C35 C36 = SparkFun-Capacitors; PROD_ID: CAP-00868
C3 C6 C11 C14 C19 C23 C28 C32 = SparkFun-Capacitors; PROD_ID: CAP-08280
C4 C7 C20 C29 = SparkFun-Capacitors; PROD_ID: CAP-14106
C5 C10 C21 C30 = SparkFun-Capacitors; PROD_ID: CAP-00810
C8 C15 C24 C33 = SparkFun-Capacitors; PROD_ID: CAP-11330
C9 C12 C13 C16 C22 C25 C31 C34 = SparkFun-Capacitors; PROD_ID: CAP-11015
D1 D7 D14 D20 = SparkFun-DiscreteSemi; PROD_ID: DIO-11284
D2 D3 D8 D9 D11 D12 D15 D17 D18 D21 D23 D24 = SparkFun-LED; PROD_ID: DIO-00819
D4 D6 D13 D19 = SparkFun-LED; PROD_ID: DIO-09003
D5 D10 D16 D22 = SparkFun-DiscreteSemi; PROD_ID: DIO-09886
E$1-E$4 FD1-FD16 LOGO1-LOGO12 U$22 U$24 U$34 U$58 U$60 U$76 U$102 U$104 U$120 U$146 U$148 U$164 = SparkFun-Aesthetics
E$5 E$6 = SparkFun-Retired
F1-F4 = SparkFun-Fuses; PROD_ID: RES-14313
H1 H5-H7 H9 H12 H14-H21 H24 H26-H29 H32 = SparkFun-Hardware
H2-H4 H8 H10 H11 H13 H22 H23 H25 H30 H31 = SparkFun-Hardware; PROD_ID: HW-14899
J1 J6 J15 J21 J27 J33 J39 J45 = SparkFun-MicroMod; PROD_ID: CONN-14877
J2 J11 J25 J37 = SparkFun-Connectors; PROD_ID: CONN-14483
J3 J17 J29 J41 = SparkFun-Connectors; PROD_ID: CONN-14122
J4 J14 J26 J38 = SparkFun-Connectors; PROD_ID: CONN-13694
J5 J9 J12 J13 J18 J19 J22 J23 J30 J31 J34 J35 J42 J43 J46 J47 TP1-TP16 = SparkFun-Connectors
J7 J24 J36 J48 = SparkFun-Connectors; PROD_ID: CONN-09696
J8 J16 J28 J40 = SparkFun-Connectors; PROD_ID: CONN-11443; SF_ID: PRT-08612
J10 J20 J32 J44 = SparkFun-Connectors; PROD_ID: CONN-16110
Q1 Q3 Q5 Q7 = SparkFun-DiscreteSemi; PROD_ID: TRANS-11308
Q2 Q4 Q6 Q8 = SparkFun-DiscreteSemi; PROD_ID: TRANS-14388
R1 R2 R20 R21 R38 R39 R56 R57 = SparkFun-Resistors; PROD_ID: RES-12083
R3 R27 R45 R63 = SparkFun-Resistors; PROD_ID: RES-08296
R4 R9 R12 R13 R19 R22 R29 R30 R33 R36 R40 R47 R48 R51 R54 R58 R65 R66 R69 R72 = SparkFun-Resistors; PROD_ID: RES-07828
R5 R16 R37 R55 = SparkFun-Resistors; PROD_ID: RES-07857
R6 R7 R24 R28 R42 R46 R60 R64 = SparkFun-Resistors; PROD_ID: RES-00824
R8 R14 R15 R26 R31 R32 R44 R49 R50 R62 R67 R68 = SparkFun-Resistors; PROD_ID: RES-08272
R10 R25 R43 R61 = SparkFun-Resistors; PROD_ID: RES-09383
R11 R17 R23 R34 R41 R52 R59 R70 = SparkFun-Resistors; PROD_ID: RES-07856
R18 R35 R53 R71 = SparkFun-Resistors; PROD_ID: RES-07863
S1-S8 = SparkFun-Switches; PROD_ID: SWCH-14139
U1 U8 U13 U18 = dip_switch; PROD_ID: IC-17058
U2 U6 U11 U16 = SparkFun-IC-Power; PROD_ID: IC-09995
U3 U9 U14 U19 = SparkFun-DiscreteSemi; PROD_ID: IC-13538
U4 U10 U15 U20 = dip_switch; PROD_ID: VREG-17101
U5 U7 U12 U17 = SparkFun-IC-Power; PROD_ID: VREG-14094
U$1-U$13 U$15 U$16 U$18 U$21 U$23 U$25-U$27 U$29-U$33 U$35-U$46 U$48-U$56 U$59 U$61-U$75 U$77-U$80 U$84-U$95 U$97-U$100 U$103 U$105-U$119 U$121-U$124 U$128-U$139 U$141-U$144 U$147 U$149-U$163 U$165-U$168 U$172-U$176 = top
U$14 U$17 U$47 U$57 U$96 U$101 U$140 U$145 = SparkFun-MicroMod
U$19 U$20 U$28 U$81-U$83 U$125-U$127 U$169-U$171 = bot

## Nets
3.3V [POWER]: 3V3_MEAS.2 3V3_MEAS.4 I2C_PU.2 J1.2 J1.74 J5.1 J6.73 Q2.2 R11.2 R12.2 R13.1 TP2.1 U1.P11
3.3V1 [POWER]: 3V3_MEAS1.2 3V3_MEAS1.4 I2C_PU1.2 J15.2 J15.74 J18.1 J21.73 Q4.2 R23.2 R29.2 R30.1 TP5.1 U8.P11
3.3V2 [POWER]: 3V3_MEAS2.2 3V3_MEAS2.4 I2C_PU2.2 J27.2 J27.74 J30.1 J33.73 Q6.2 R41.2 R47.2 R48.1 TP9.1 U13.P11
3.3V3 [POWER]: 3V3_MEAS3.2 3V3_MEAS3.4 I2C_PU3.2 J39.2 J39.74 J42.1 J45.73 Q8.2 R59.2 R65.2 R66.1 TP13.1 U18.P11
3.3V_EN: J1.4 VE.1
3.3V_EN1: J15.4 VE1.1
3.3V_EN2: J27.4 VE2.1
3.3V_EN3: J39.4 VE3.1
3.3V_EN_VE: D1.C R9.1 U5.5 VE.2
3.3V_EN_VE1: D7.C R22.1 U7.5 VE1.2
3.3V_EN_VE2: D14.C R40.1 U12.5 VE2.2
3.3V_EN_VE3: D20.C R58.1 U17.5 VE3.2
3.3V_QWIIC: C1.1 J2.2 J4.2 R17.2 U4.5
3.3V_QWIIC1: C17.1 J11.2 J14.2 R34.2 U10.5
3.3V_QWIIC2: C26.1 J25.2 J26.2 R52.2 U15.5
3.3V_QWIIC3: C35.1 J37.2 J38.2 R70.2 U20.5
3V3_MEAS: 3V3_MEAS.1 3V3_MEAS.3 C9.1 C11.1 U5.1
3V3_MEAS1: 3V3_MEAS1.1 3V3_MEAS1.3 C13.1 C14.1 U7.1
3V3_MEAS2: 3V3_MEAS2.1 3V3_MEAS2.3 C22.1 C23.1 U12.1
3V3_MEAS3: 3V3_MEAS3.1 3V3_MEAS3.3 C31.1 C32.1 U17.1
!BOOT!: J1.11 J6.66 S2.3 S2.4
!BOOT!1: J15.11 J21.66 S4.3 S4.4
!BOOT!2: J27.11 J33.66 S6.3 S6.4
!BOOT!3: J39.11 J45.66 S8.3 S8.4
!CS0!-PROCESSOR: J1.55 J6.49
!CS0!-PROCESSOR1: J15.55 J21.49
!CS0!-PROCESSOR2: J27.55 J33.49
!CS0!-PROCESSOR3: J39.55 J45.49
!DFU-FC0!: J6.10 R13.2 U1.P12
!DFU-FC0!1: J21.10 R30.2 U8.P12
!DFU-FC0!2: J33.10 R48.2 U13.P12
!DFU-FC0!3: J45.10 R66.2 U18.P12
!RESET!: J1.6 J5.10 J6.68 J13.1 S1.3 S1.4
!RESET!1: J15.6 J18.10 J19.1 J21.68 S3.3 S3.4
!RESET!2: J27.6 J30.10 J31.1 J33.68 S5.3 S5.4
!RESET!3: J39.6 J42.10 J43.1 J45.68 S7.3 S7.4
!SEL!/2IN: J7.3 R12.1 U1.P10
!SEL!/2IN1: J24.3 R29.1 U8.P10
!SEL!/2IN2: J36.3 R47.1 U13.P10
!SEL!/2IN3: J48.3 R65.1 U18.P10
A0-PROCESSOR: J1.34 J6.38
A0-PROCESSOR1: J15.34 J21.38
A0-PROCESSOR2: J27.34 J33.38
A0-PROCESSOR3: J39.34 J45.38
CTS1-PROCESSOR: J1.15 J6.16
CTS1-PROCESSOR1: J15.15 J21.16
CTS1-PROCESSOR2: J27.15 J33.16
CTS1-PROCESSOR3: J39.15 J45.16
D0-PROCESSOR: J1.10 J6.47
D0-PROCESSOR1: J15.10 J21.47
D0-PROCESSOR2: J27.10 J33.47
D0-PROCESSOR3: J39.10 J45.47
D1-PROCESSOR/SD_CARD_!CS!: J1.18 J10.2
D1-PROCESSOR/SD_CARD_!CS!1: J15.18 J20.2
D1-PROCESSOR/SD_CARD_!CS!2: J27.18 J32.2
D1-PROCESSOR/SD_CARD_!CS!3: J39.18 J44.2
D+ [Diff pairs]: J1.3 J3.A6 J3.B6 U3.6
D+1 [Diff pairs]: J15.3 J17.A6 J17.B6 U9.6
D+2 [Diff pairs]: J27.3 J29.A6 J29.B6 U14.6
D+3 [Diff pairs]: J39.3 J41.A6 J41.B6 U19.6
D- [Diff pairs]: J1.5 J3.A7 J3.B7 U3.4
D-1 [Diff pairs]: J15.5 J17.A7 J17.B7 U9.4
D-2 [Diff pairs]: J27.5 J29.A7 J29.B7 U14.4
D-3 [Diff pairs]: J39.5 J41.A7 J41.B7 U19.4
G0-PROCESSOR: J1.40 J6.53
G0-PROCESSOR1: J15.40 J21.53
G0-PROCESSOR2: J27.40 J33.53
G0-PROCESSOR3: J39.40 J45.53
G1-PROCESSOR: J1.42 J6.55
G1-PROCESSOR1: J15.42 J21.55
G1-PROCESSOR2: J27.42 J33.55
G1-PROCESSOR3: J39.42 J45.55
G2-PROCESSOR: J1.44 J6.57
G2-PROCESSOR1: J15.44 J21.57
G2-PROCESSOR2: J27.44 J33.57
G2-PROCESSOR3: J39.44 J45.57
G3-PROCESSOR: J1.46 J6.59
G3-PROCESSOR1: J15.46 J21.59
G3-PROCESSOR2: J27.46 J33.59
G3-PROCESSOR3: J39.46 J45.59
G4-PROCESSOR: J1.48 J6.61
G4-PROCESSOR1: J15.48 J21.61
G4-PROCESSOR2: J27.48 J33.61
G4-PROCESSOR3: J39.48 J45.61
GND: 3V3_LED.1 5V_LED.1 C1.2 C2.2 C3.2 C4.2 C5.2 C8.2 C9.2 C11.2 C12.2 D1.A DIVIDER.1 H2.1 H4.1 H8.1 J1.1 J1.7 J1.33 J1.36 J1.39 J1.45 J1.75 J2.1 J3.GND J3.GND2 J4.1 J5.3 J5.5 J5.9 J6.1 J6.2 J6.8 J6.32 J6.33 J6.34 J6.36 J6.39 J6.45 J6.75 J7.4 J8.1 J9.1 J10.6 J10.10 J10.11 J10.12 J10.13 J12.1 QWIIC_LED.1 R1.1 R2.1 R3.1 R6.1 R19.2 S1.1 S1.2 S2.1 S2.2 SHLD.1 U1.P5 U2.2 U3.2 U4.2 U5.4 U5.EP
GND1: 3V3_LED1.1 5V_LED1.1 C6.2 C7.2 C10.2 C13.2 C14.2 C15.2 C16.2 C17.2 C18.2 D7.A DIVIDER1.1 H3.1 H10.1 H11.1 J11.1 J14.1 J15.1 J15.7 J15.33 J15.36 J15.39 J15.45 J15.75 J16.1 J17.GND J17.GND2 J18.3 J18.5 J18.9 J20.6 J20.10 J20.11 J20.12 J20.13 J21.1 J21.2 J21.8 J21.32 J21.33 J21.34 J21.36 J21.39 J21.45 J21.75 J22.1 J23.1 J24.4 QWIIC_LED1.1 R20.1 R21.1 R27.1 R28.1 R36.2 S3.1 S3.2 S4.1 S4.2 SHLD1.1 U6.2 U7.4 U7.EP U8.P5 U9.2 U10.2
GND2: 3V3_LED2.1 5V_LED2.1 C19.2 C20.2 C21.2 C22.2 C23.2 C24.2 C25.2 C26.2 C27.2 D14.A DIVIDER2.1 H13.1 H22.1 H23.1 J25.1 J26.1 J27.1 J27.7 J27.33 J27.36 J27.39 J27.45 J27.75 J28.1 J29.GND J29.GND2 J30.3 J30.5 J30.9 J32.6 J32.10 J32.11 J32.12 J32.13 J33.1 J33.2 J33.8 J33.32 J33.33 J33.34 J33.36 J33.39 J33.45 J33.75 J34.1 J35.1 J36.4 QWIIC_LED2.1 R38.1 R39.1 R45.1 R46.1 R54.2 S5.1 S5.2 S6.1 S6.2 SHLD2.1 U11.2 U12.4 U12.EP U13.P5 U14.2 U15.2
GND3: 3V3_LED3.1 5V_LED3.1 C28.2 C29.2 C30.2 C31.2 C32.2 C33.2 C34.2 C35.2 C36.2 D20.A DIVIDER3.1 H25.1 H30.1 H31.1 J37.1 J38.1 J39.1 J39.7 J39.33 J39.36 J39.39 J39.45 J39.75 J40.1 J41.GND J41.GND2 J42.3 J42.5 J42.9 J44.6 J44.10 J44.11 J44.12 J44.13 J45.1 J45.2 J45.8 J45.32 J45.33 J45.34 J45.36 J45.39 J45.45 J45.75 J46.1 J47.1 J48.4 QWIIC_LED3.1 R56.1 R57.1 R63.1 R64.1 R72.2 S7.1 S7.2 S8.1 S8.2 SHLD3.1 U16.2 U17.4 U17.EP U18.P5 U19.2 U20.2
HOST_D+ [Diff pairs]: J1.35 J6.35
HOST_D+1 [Diff pairs]: J15.35 J21.35
HOST_D+2 [Diff pairs]: J27.35 J33.35
HOST_D+3 [Diff pairs]: J39.35 J45.35
HOST_D- [Diff pairs]: J1.37 J6.37
HOST_D-1 [Diff pairs]: J15.37 J21.37
HOST_D-2 [Diff pairs]: J27.37 J33.37
HOST_D-3 [Diff pairs]: J39.37 J45.37
I2C_!INT!: J1.16 J6.23
I2C_!INT!1: J15.16 J21.23
I2C_!INT!2: J27.16 J33.23
I2C_!INT!3: J39.16 J45.23
I2C_SCL: J1.14 J2.4 J4.4 J6.21 R15.1
I2C_SCL1: J11.4 J14.4 J15.14 J21.21 R32.1
I2C_SCL1-PROCESSOR/QWIIC_EN: J1.53 R4.1 U4.3
I2C_SCL1-PROCESSOR/QWIIC_EN1: J15.53 R33.1 U10.3
I2C_SCL1-PROCESSOR/QWIIC_EN2: J27.53 R51.1 U15.3
I2C_SCL1-PROCESSOR/QWIIC_EN3: J39.53 R69.1 U20.3
I2C_SCL2: J25.4 J26.4 J27.14 J33.21 R50.1
I2C_SCL3: J37.4 J38.4 J39.14 J45.21 R68.1
I2C_SDA: J1.12 J2.3 J4.3 J6.19 R14.1
I2C_SDA1: J11.3 J14.3 J15.12 J21.19 R31.1
I2C_SDA1-PROCESSOR/!SD_ENABLE!: J1.51 R18.1
I2C_SDA1-PROCESSOR/!SD_ENABLE!1: J15.51 R35.1
I2C_SDA1-PROCESSOR/!SD_ENABLE!2: J27.51 R53.1
I2C_SDA1-PROCESSOR/!SD_ENABLE!3: J39.51 R71.1
I2C_SDA2: J25.3 J26.3 J27.12 J33.19 R49.1
I2C_SDA3: J37.3 J38.3 J39.12 J45.19 R67.1
N$1: J17.B5 R21.2
N$2: 5V_LED.2 D8.C
N$3: D3.A R11.1
N$4: J3.B5 R2.2
N$5: J3.A5 R1.2
N$6: R3.2 U2.5
N$7: DIVIDER.2 R7.1
N$8: D4.C U2.1
N$9: D4.A R5.2
N$10: 3V3_LED.2 D3.C
N$11: I2C_PU.3 R14.2
N$12: D8.A R8.1
N$13: I2C_PU.1 R15.2
N$14: D2.A R17.1
N$15: D2.C QWIIC_LED.2
N$16 [POWER]: C12.1 J10.4 Q2.3
N$17: J17.A5 R20.2
N$18: Q2.1 R18.2 R19.1
N$19: D9.A R23.1
N$20: D11.A R26.1
N$21: 5V_LED1.2 D11.C
N$22: 3V3_LED1.2 D9.C
N$23: I2C_PU1.3 R31.2
N$24: I2C_PU1.1 R32.2
N$25: R27.2 U6.5
N$26: DIVIDER1.2 R24.1
N$27: D6.C U6.1
N$28: D6.A R16.2
N$29: D12.A R34.1
N$30: D12.C QWIIC_LED1.2
N$31: Q4.1 R35.2 R36.1
N$32 [POWER]: C16.1 J20.4 Q4.3
N$33: J29.B5 R39.2
N$34: J29.A5 R38.2
N$35: D15.A R41.1
N$36: D17.A R44.1
N$37: 5V_LED2.2 D17.C
N$38: 3V3_LED2.2 D15.C
N$39: I2C_PU2.3 R49.2
N$40: I2C_PU2.1 R50.2
N$41: R45.2 U11.5
N$42: DIVIDER2.2 R42.1
N$43: D13.C U11.1
N$44: D13.A R37.2
N$45: D18.A R52.1
N$46: D18.C QWIIC_LED2.2
N$47: Q6.1 R53.2 R54.1
N$48 [POWER]: C25.1 J32.4 Q6.3
N$49: J41.B5 R57.2
N$50: J41.A5 R56.2
N$51: D21.A R59.1
N$52: D23.A R62.1
N$53: 5V_LED3.2 D23.C
N$54: 3V3_LED3.2 D21.C
N$55: I2C_PU3.3 R67.2
N$56: I2C_PU3.1 R68.2
N$57: R63.2 U16.5
N$58: DIVIDER3.2 R60.1
N$59: D19.C U16.1
N$60: D19.A R55.2
N$61: D24.A R70.1
N$62: D24.C QWIIC_LED3.2
N$63: Q8.1 R71.2 R72.1
N$64 [POWER]: C34.1 J44.4 Q8.3
PROCESSOR_CAN-RX: J1.41 J6.43
PROCESSOR_CAN-RX1: J15.41 J21.43
PROCESSOR_CAN-RX2: J27.41 J33.43
PROCESSOR_CAN-RX3: J39.41 J45.43
PROCESSOR_CAN-TX: J1.43 J6.41
PROCESSOR_CAN-TX1: J15.43 J21.41
PROCESSOR_CAN-TX2: J27.43 J33.41
PROCESSOR_CAN-TX3: J39.43 J45.41
PWM0-PROCESSOR: J1.32 J6.51
PWM0-PROCESSOR1: J15.32 J21.51
PWM0-PROCESSOR2: J27.32 J33.51
PWM0-PROCESSOR3: J39.32 J45.51
PWR_EN0: J1.47 J6.71
PWR_EN1: J15.47 J21.71
PWR_EN2: J27.47 J33.71
PWR_EN3: J39.47 J45.71
RTS1-PROCESSOR: J1.13 J6.18
RTS1-PROCESSOR1: J15.13 J21.18
RTS1-PROCESSOR2: J27.13 J33.18
RTS1-PROCESSOR3: J39.13 J45.18
RX1-DFU_TX-FC0-PLEX: J6.4 U1.P9
RX1-DFU_TX-FC0-PLEX1: J21.4 U8.P9
RX1-DFU_TX-FC0-PLEX2: J33.4 U13.P9
RX1-DFU_TX-FC0-PLEX3: J45.4 U18.P9
RX1-PROCESSOR: J1.19 U1.P6
RX1-PROCESSOR1: J15.19 U8.P6
RX1-PROCESSOR2: J27.19 U13.P6
RX1-PROCESSOR3: J39.19 U18.P6
RX1-PROCESSOR-PLEX: J6.13 U1.P7
RX1-PROCESSOR-PLEX1: J21.13 U8.P7
RX1-PROCESSOR-PLEX2: J33.13 U13.P7
RX1-PROCESSOR-PLEX3: J45.13 U18.P7
RX1/2S1: J24.2 U8.P8
RX1/2S2: J7.2 U1.P8
RX1/2S3: J36.2 U13.P8
RX1/2S4: J48.2 U18.P8
SHLD: J3.SHLD1 J3.SHLD2 J3.SHLD3 J3.SHLD4 SHLD.2
SHLD1: J17.SHLD1 J17.SHLD2 J17.SHLD3 J17.SHLD4 SHLD1.2
SHLD2: J29.SHLD1 J29.SHLD2 J29.SHLD3 J29.SHLD4 SHLD2.2
SHLD3: J41.SHLD1 J41.SHLD2 J41.SHLD3 J41.SHLD4 SHLD3.2
SPI_PROCESSOR_SCK: J1.57 J6.3 J10.5
SPI_PROCESSOR_SCK1: J15.57 J20.5 J21.3
SPI_PROCESSOR_SCK2: J27.57 J32.5 J33.3
SPI_PROCESSOR_SCK3: J39.57 J44.5 J45.3
SPI_PROCESSOR_SDI: J1.61 J6.7 J10.7
SPI_PROCESSOR_SDI1: J15.61 J20.7 J21.7
SPI_PROCESSOR_SDI2: J27.61 J32.7 J33.7
SPI_PROCESSOR_SDI3: J39.61 J44.7 J45.7
SPI_PROCESSOR_SDO: J1.59 J6.5 J10.3
SPI_PROCESSOR_SDO1: J15.59 J20.3 J21.5
SPI_PROCESSOR_SDO2: J27.59 J32.3 J33.5
SPI_PROCESSOR_SDO3: J39.59 J44.3 J45.5
SWDCK: J1.21 J5.4
SWDCK1: J15.21 J18.4
SWDCK2: J27.21 J30.4
SWDCK3: J39.21 J42.4
SWDIO: J1.23 J5.2 TP1.1
SWDIO1: J15.23 J18.2 TP8.1
SWDIO2: J27.23 J30.2 TP12.1
SWDIO3: J39.23 J42.2 TP16.1
TX1-DFU_RX-FC0-PLEX: J6.6 U1.P1
TX1-DFU_RX-FC0-PLEX1: J21.6 U8.P1
TX1-DFU_RX-FC0-PLEX2: J33.6 U13.P1
TX1-DFU_RX-FC0-PLEX3: J45.6 U18.P1
TX1-PROCESSOR: J1.17 U1.P4
TX1-PROCESSOR1: J15.17 U8.P4
TX1-PROCESSOR2: J27.17 U13.P4
TX1-PROCESSOR3: J39.17 U18.P4
TX1-PROCESSOR-PLEX: J6.15 U1.P3
TX1-PROCESSOR-PLEX1: J21.15 U8.P3
TX1-PROCESSOR-PLEX2: J33.15 U13.P3
TX1-PROCESSOR-PLEX3: J45.15 U18.P3
TX1/1S1: J24.1 U8.P2
TX1/1S2: J7.1 U1.P2
TX1/1S3: J36.1 U13.P2
TX1/1S4: J48.1 U18.P2
V_BATT [POWER]: C4.1 J8.2 J12.2 Q1.3 TP3.1 U2.3
V_BATT1 [POWER]: C7.1 J16.2 J23.2 Q3.3 TP6.1 U6.3
V_BATT2 [POWER]: C20.1 J28.2 J35.2 Q5.3 TP10.1 U11.3
V_BATT3 [POWER]: C29.1 J40.2 J47.2 Q7.3 TP14.1 U16.3
V_USB: BYP.1 F2.1 J3.VBUS1 J3.VBUS2 U3.5
V_USB1: BYP1.1 F1.1 J17.VBUS1 J17.VBUS2 U9.5
V_USB2: BYP2.1 F3.1 J29.VBUS1 J29.VBUS2 U14.5
V_USB3: BYP3.1 F4.1 J41.VBUS1 J41.VBUS2 U19.5
VCC: 5V_MEAS.1 5V_MEAS.3 C2.1 D5.C J6.72 J6.74 Q1.2 R4.2 U4.1
VCC1: 5V_MEAS1.1 5V_MEAS1.3 C18.1 D10.C J21.72 J21.74 Q3.2 R33.2 U10.1
VCC2: 5V_MEAS2.1 5V_MEAS2.3 C27.1 D16.C J33.72 J33.74 Q5.2 R51.2 U15.1
VCC3: 5V_MEAS3.1 5V_MEAS3.3 C36.1 D22.C J45.72 J45.74 Q7.2 R69.2 U20.1
VCC_MEAS: 5V_MEAS.2 5V_MEAS.4 C5.1 C8.1 R9.2 U5.8
VCC_MEAS1: 5V_MEAS1.2 5V_MEAS1.4 C10.1 C15.1 R22.2 U7.8
VCC_MEAS2: 5V_MEAS2.2 5V_MEAS2.4 C21.1 C24.1 R40.2 U12.8
VCC_MEAS3: 5V_MEAS3.2 5V_MEAS3.4 C30.1 C33.1 R58.2 U17.8
VIN: BYP.2 C3.1 D5.A F2.2 J1.9 Q1.1 R5.1 R6.2 R8.2 R10.2 TP4.1 U2.4
VIN1: BYP1.2 C6.1 D10.A F1.2 J15.9 Q3.1 R16.1 R25.2 R26.2 R28.2 TP7.1 U6.4
VIN2: BYP2.2 C19.1 D16.A F3.2 J27.9 Q5.1 R37.1 R43.2 R44.2 R46.2 TP11.1 U11.4
VIN3: BYP3.2 C28.1 D22.A F4.2 J39.9 Q7.1 R55.1 R61.2 R62.2 R64.2 TP15.1 U16.4
VIN/1: J15.49 R24.2 R25.1
VIN/2: J27.49 R42.2 R43.1
VIN/3: J1.49 R7.2 R10.1
VIN/4: J39.49 R60.2 R61.1

## Tracks (layer width: path | path; a pad name or v marks a point on that pad's centre or on a via)
3.3V  (via drill 0.3, 0.35)  (4 unrouted)
  Top 0.203: J5.1 89.4,25.65 88.19,24.44 88.19,22.02 87.55,21.37 v85.85,21.37
  Top 0.254: U1.P11 v14.13,21.48
  Top 0.559: v77.01,40.39 77.01,21.72 v76.63,21.34 76.58,21.34 76.58,21.29 v70.87,15.57 70.84,15.54 46.08,15.54 v46.05,15.57 | v14.13,21.48 R12.2 | v82.55,42.16 83.57,43.18 3V3_MEAS.4 | v55.12,54.35 55.96,55.19 60.58,55.19 64.29,58.9 64.29,63.1 63.88,63.52 Q2.2 | 3V3_MEAS.2 3V3_MEAS.4 | R11.2 84.47,46.46 3V3_MEAS.4 | R13.1 10.62,18.55 v10.62,18.03
  Bottom 0.203: TP2.1 89.27,28.21 89.47,28 J5.1 | v85.85,21.37 85.82,21.34 v76.63,21.34
  Bottom 0.559: v55.12,54.35 55.12,42.39 v55.12,40.39 | v82.55,42.16 80.77,40.39 v77.01,40.39 v73.41,40.39 v55.12,40.39 | v46.05,15.57 22.45,15.57 22.4,15.62 | v22.4,16.81 22.4,15.62 | I2C_PU.2 v70.87,15.57 | 22.4,15.62 22.33,15.54 11.33,15.54 10.62,16.26 v10.62,18.03 10.62,20.78 11.21,21.37 14.03,21.37 v14.13,21.48 | v55.12,40.39 v54.46,40.39
  other vias: 74.07,40.39
  pour Top (isolate 0.305, no thermals): 54.7,39.56 54.71,39.53 54.71,38.15 55.35,38.15 55.35,40.87 54.23,40.87 54.23,40.03
  pour Top (isolate 0.305, no thermals): 73.15,38.1 73.66,38.1 73.66,39.3 73.68,39.33 74.42,40.08 74.42,40.89 73.15,40.89
  pour Top (no thermals): 22.4,16.55 22.43,16.56 22.61,16.56 22.61,17.12 22.1,17.12 22.1,15.01 22.38,15.01 22.38,16.51 22.39,16.53
3.3V1  (via drill 0.3, 0.35)  (4 unrouted)
  Top 0.203: J18.1 176.27,25.65 175.06,24.44 175.06,22.02 174.41,21.37 v172.72,21.37
  Top 0.254: U8.P11 v101,21.48
  Top 0.559: v163.88,40.39 163.88,21.72 v163.5,21.34 163.45,21.34 163.45,21.29 v157.73,15.57 157.71,15.54 132.94,15.54 v132.92,15.57 | v101,21.48 R29.2 | v169.42,42.16 170.43,43.18 3V3_MEAS1.4 | v141.99,54.35 142.83,55.19 147.45,55.19 151.16,58.9 151.16,63.1 150.74,63.52 Q4.2 | 3V3_MEAS1.2 3V3_MEAS1.4 | R23.2 171.34,46.46 3V3_MEAS1.4 | R30.1 97.48,18.55 v97.48,18.03
  Bottom 0.203: TP5.1 176.14,28.21 176.34,28 J18.1 | v172.72,21.37 172.69,21.34 v163.5,21.34
  Bottom 0.559: v141.99,54.35 141.99,42.39 v141.99,40.39 | v169.42,42.16 167.64,40.39 v163.88,40.39 v160.27,40.39 v141.99,40.39 | v132.92,15.57 109.32,15.57 109.27,15.62 | v109.27,16.81 109.27,15.62 | I2C_PU1.2 v157.73,15.57 | 109.27,15.62 109.2,15.54 98.2,15.54 97.48,16.26 v97.48,18.03 97.48,20.78 98.08,21.37 100.89,21.37 v101,21.48 | v141.99,40.39 v141.33,40.39
  other vias: 160.93,40.39
  pour Top (isolate 0.305, no thermals): 141.56,39.56 141.58,39.53 141.58,38.15 142.21,38.15 142.21,40.87 141.1,40.87 141.1,40.03
  pour Top (isolate 0.305, no thermals): 160.02,38.1 160.53,38.1 160.53,39.3 160.54,39.33 161.29,40.08 161.29,40.89 160.02,40.89
  pour Top (no thermals): 109.27,16.55 109.3,16.56 109.47,16.56 109.47,17.12 108.97,17.12 108.97,15.01 109.25,15.01 109.25,16.51 109.26,16.53
3.3V2  (via drill 0.3, 0.35)  (4 unrouted)
  Top 0.203: J30.1 89.4,103.37 88.19,102.16 88.19,99.74 87.55,99.09 v85.85,99.09
  Top 0.254: U13.P11 v14.13,99.2
  Top 0.559: v77.01,118.11 77.01,99.44 v76.63,99.06 76.58,99.06 76.58,99.01 v70.87,93.29 70.84,93.27 46.08,93.27 v46.05,93.29 | v14.13,99.2 R47.2 | v82.55,119.89 83.57,120.9 3V3_MEAS2.4 | v55.12,132.07 55.96,132.91 60.58,132.91 64.29,136.63 64.29,140.83 63.88,141.24 Q6.2 | 3V3_MEAS2.2 3V3_MEAS2.4 | R41.2 84.47,124.18 3V3_MEAS2.4 | R48.1 10.62,96.28 v10.62,95.76
  Bottom 0.203: TP9.1 89.27,105.93 89.47,105.73 J30.1 | v85.85,99.09 85.82,99.06 v76.63,99.06